# Altium PCB Drude02.PcbDoc (part 1 of 3)
Units mil, origin at the board's own origin, x right, y up, seen from the top; angles counter-clockwise.
Board outline 1961.13 x 2874.02 mil, 4 copper layers (Top Layer, GND, Supply, Bottom Layer), stack 59.85 mil thick; 217 components, 145 nets, 718 pads, 491 vias.
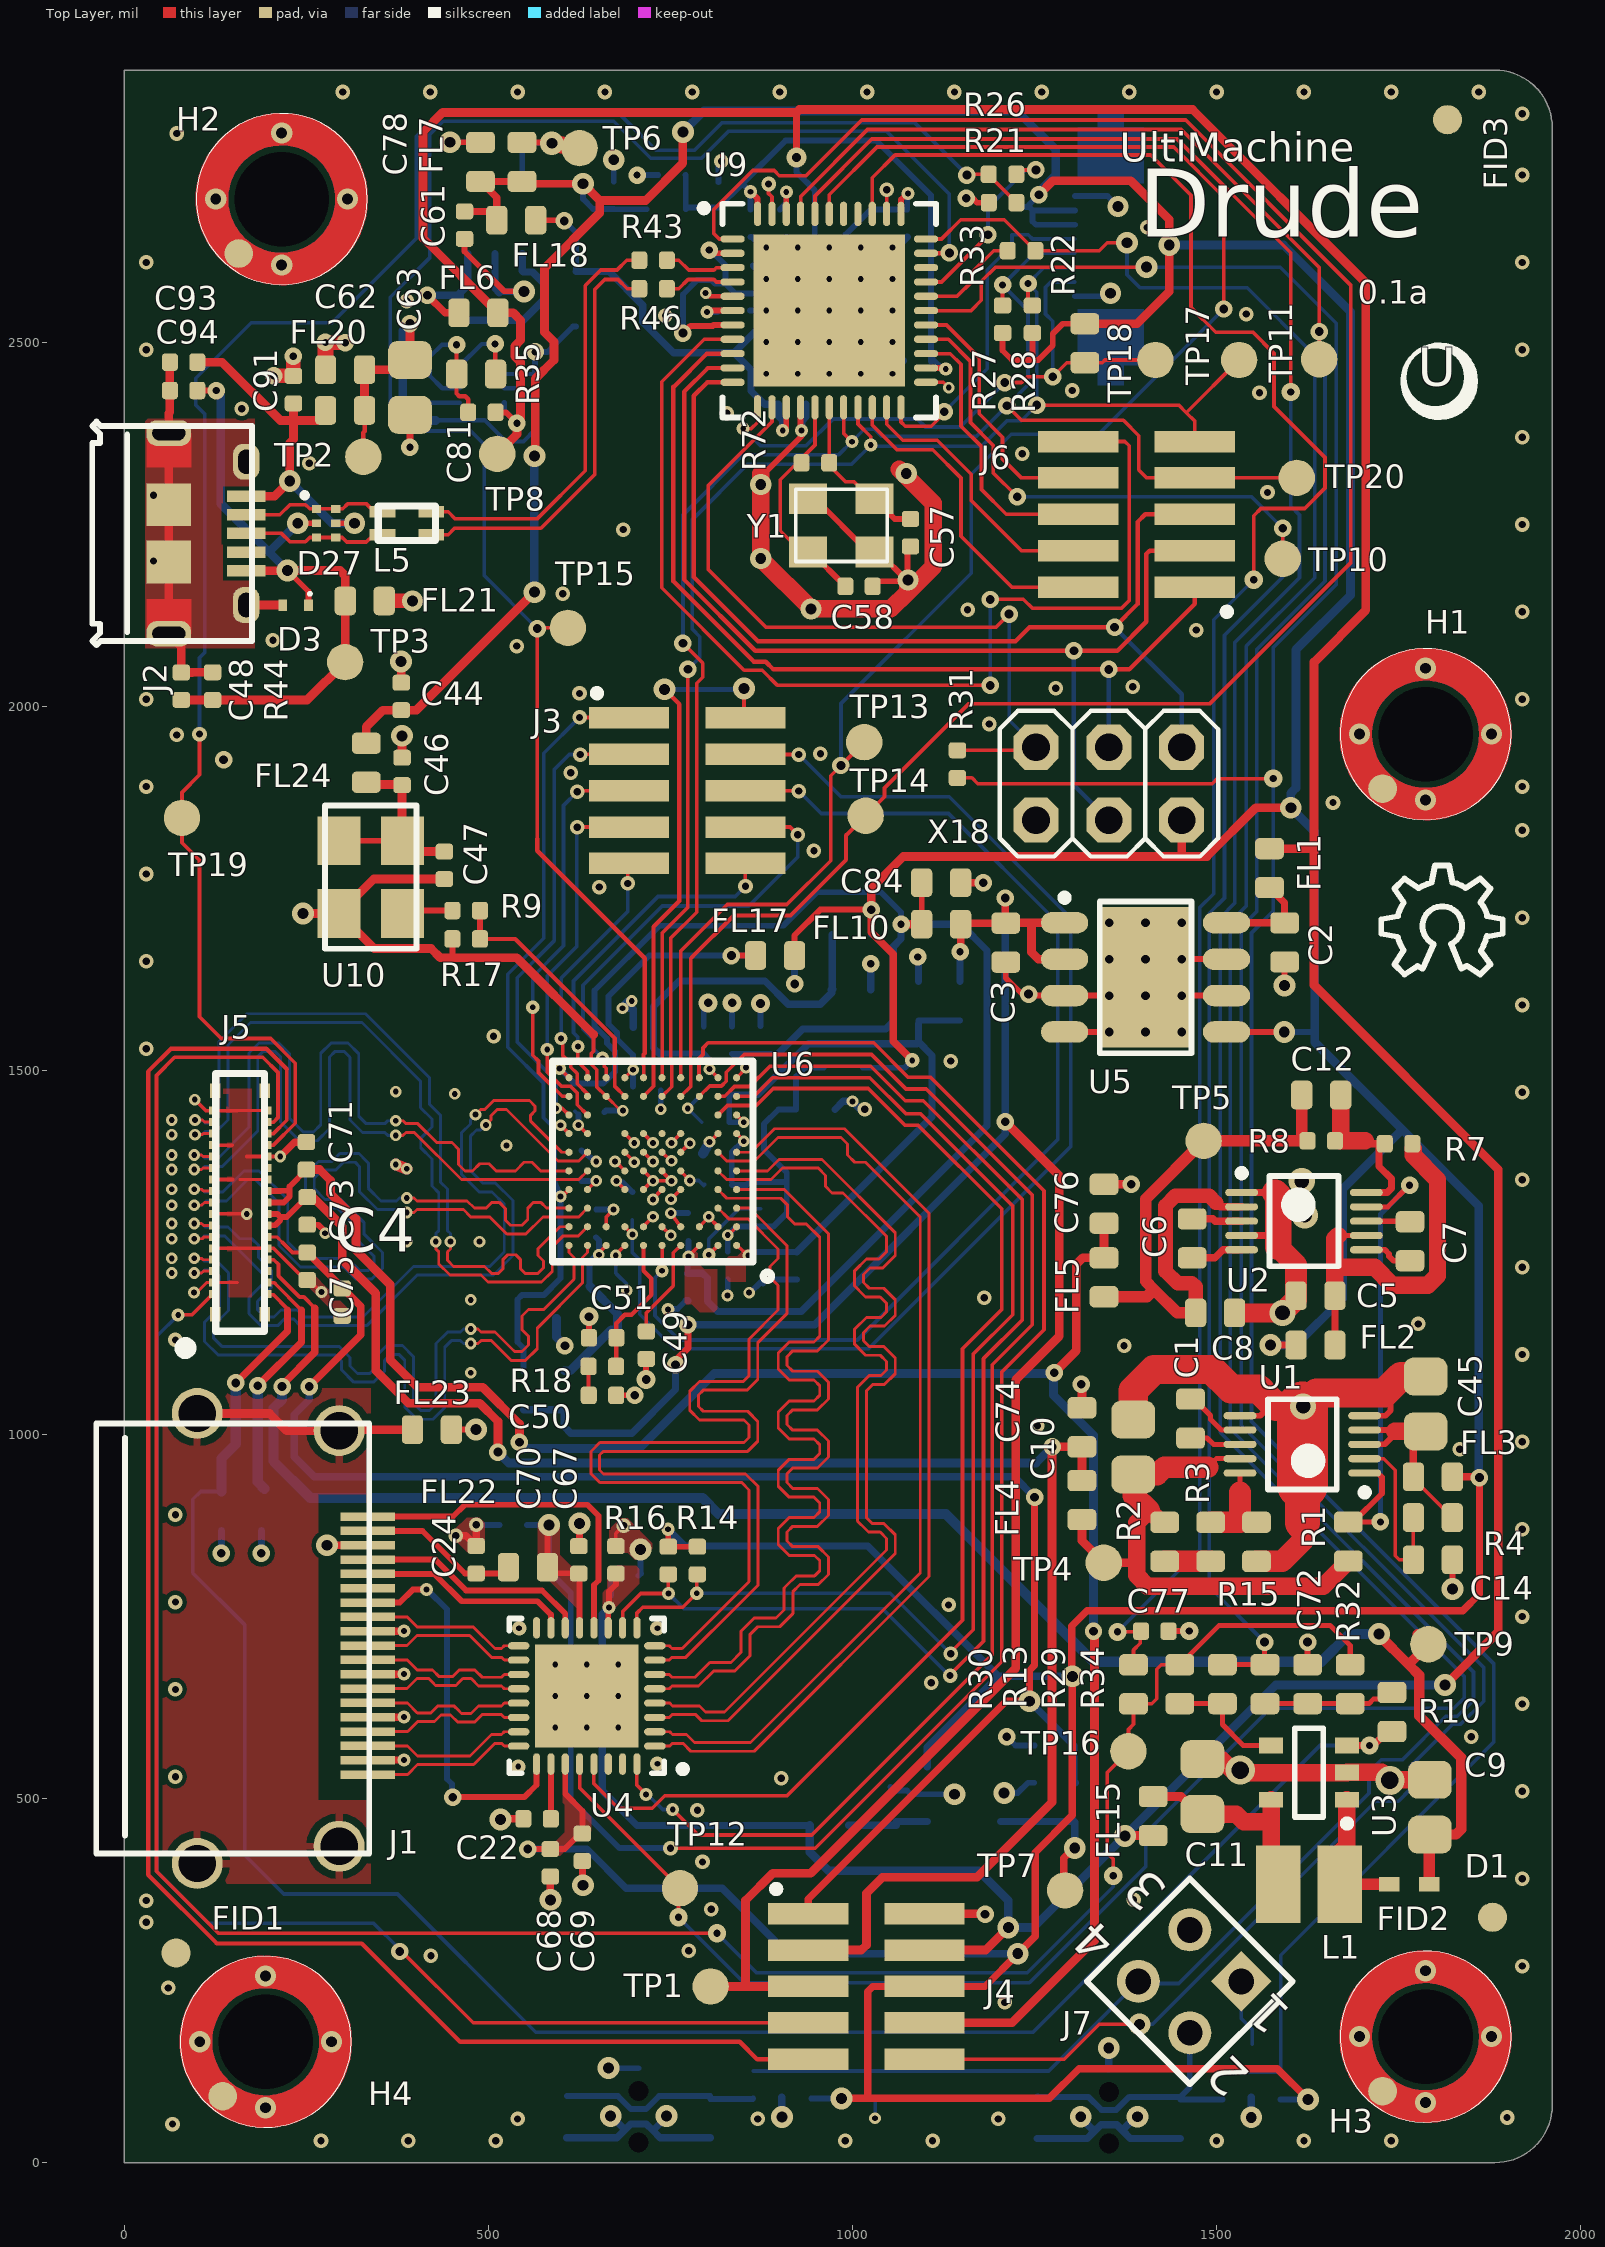
[diagram p0: Top Layer view]
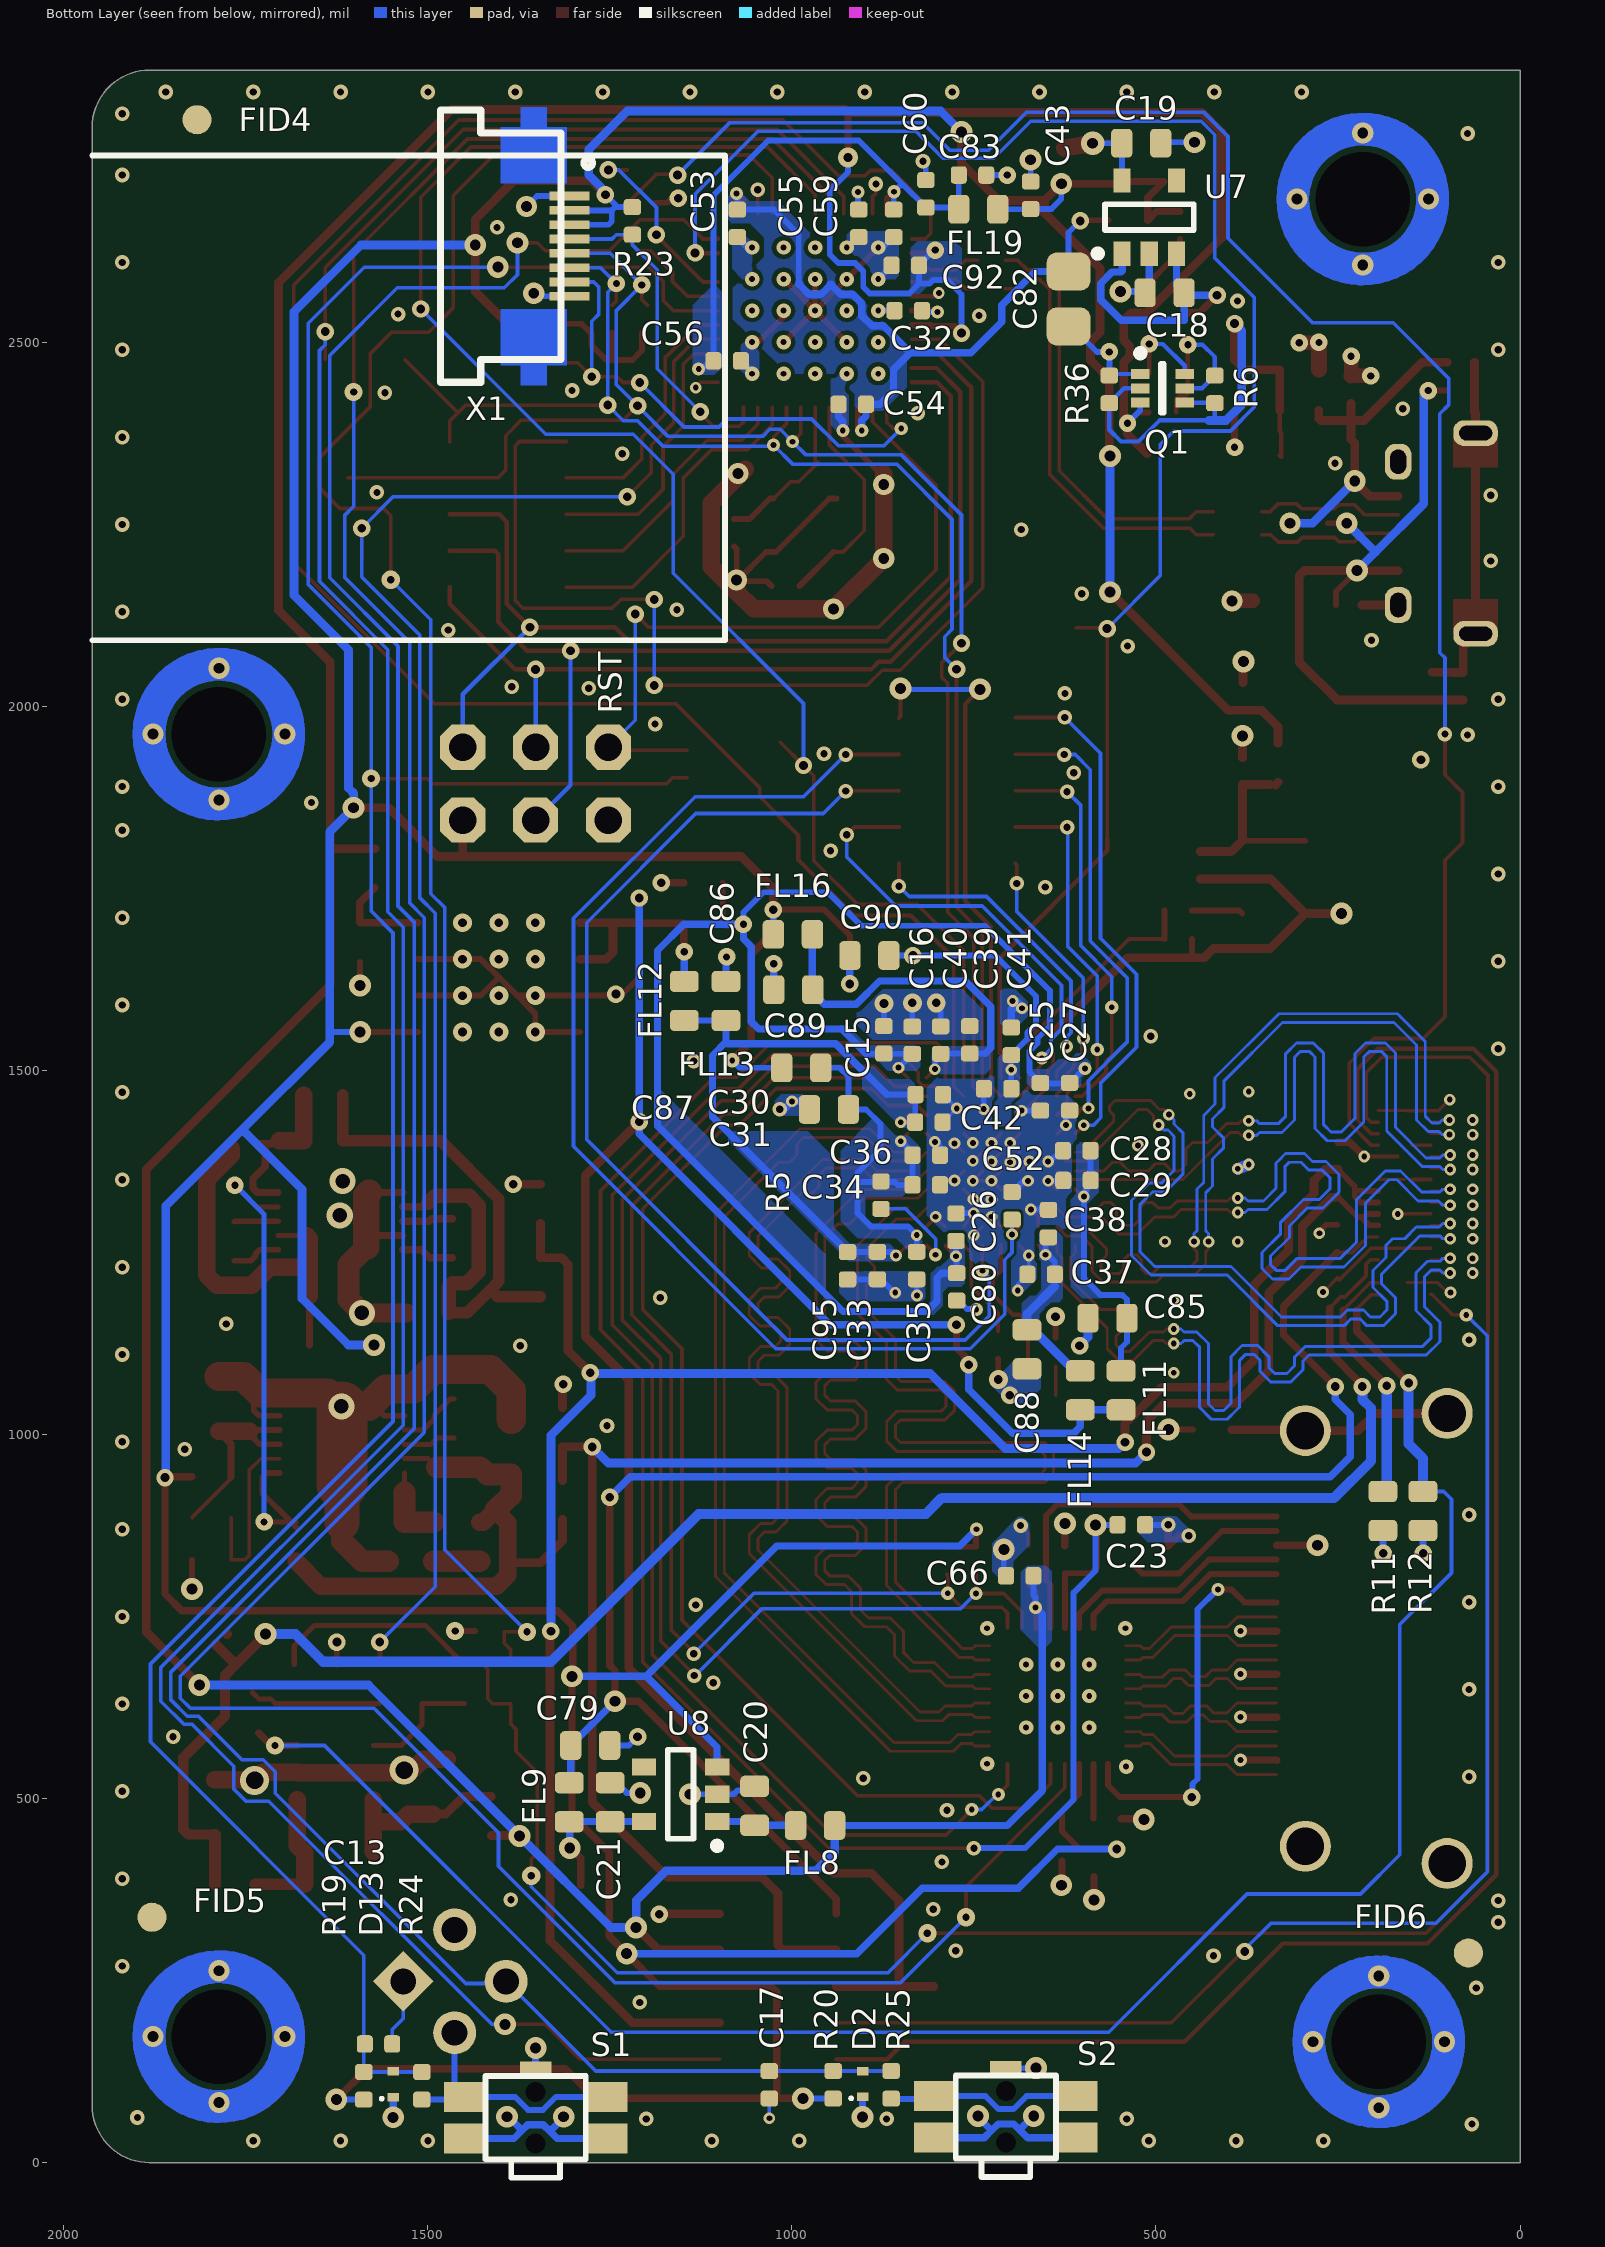
[diagram p1: Bottom Layer view, seen from below]
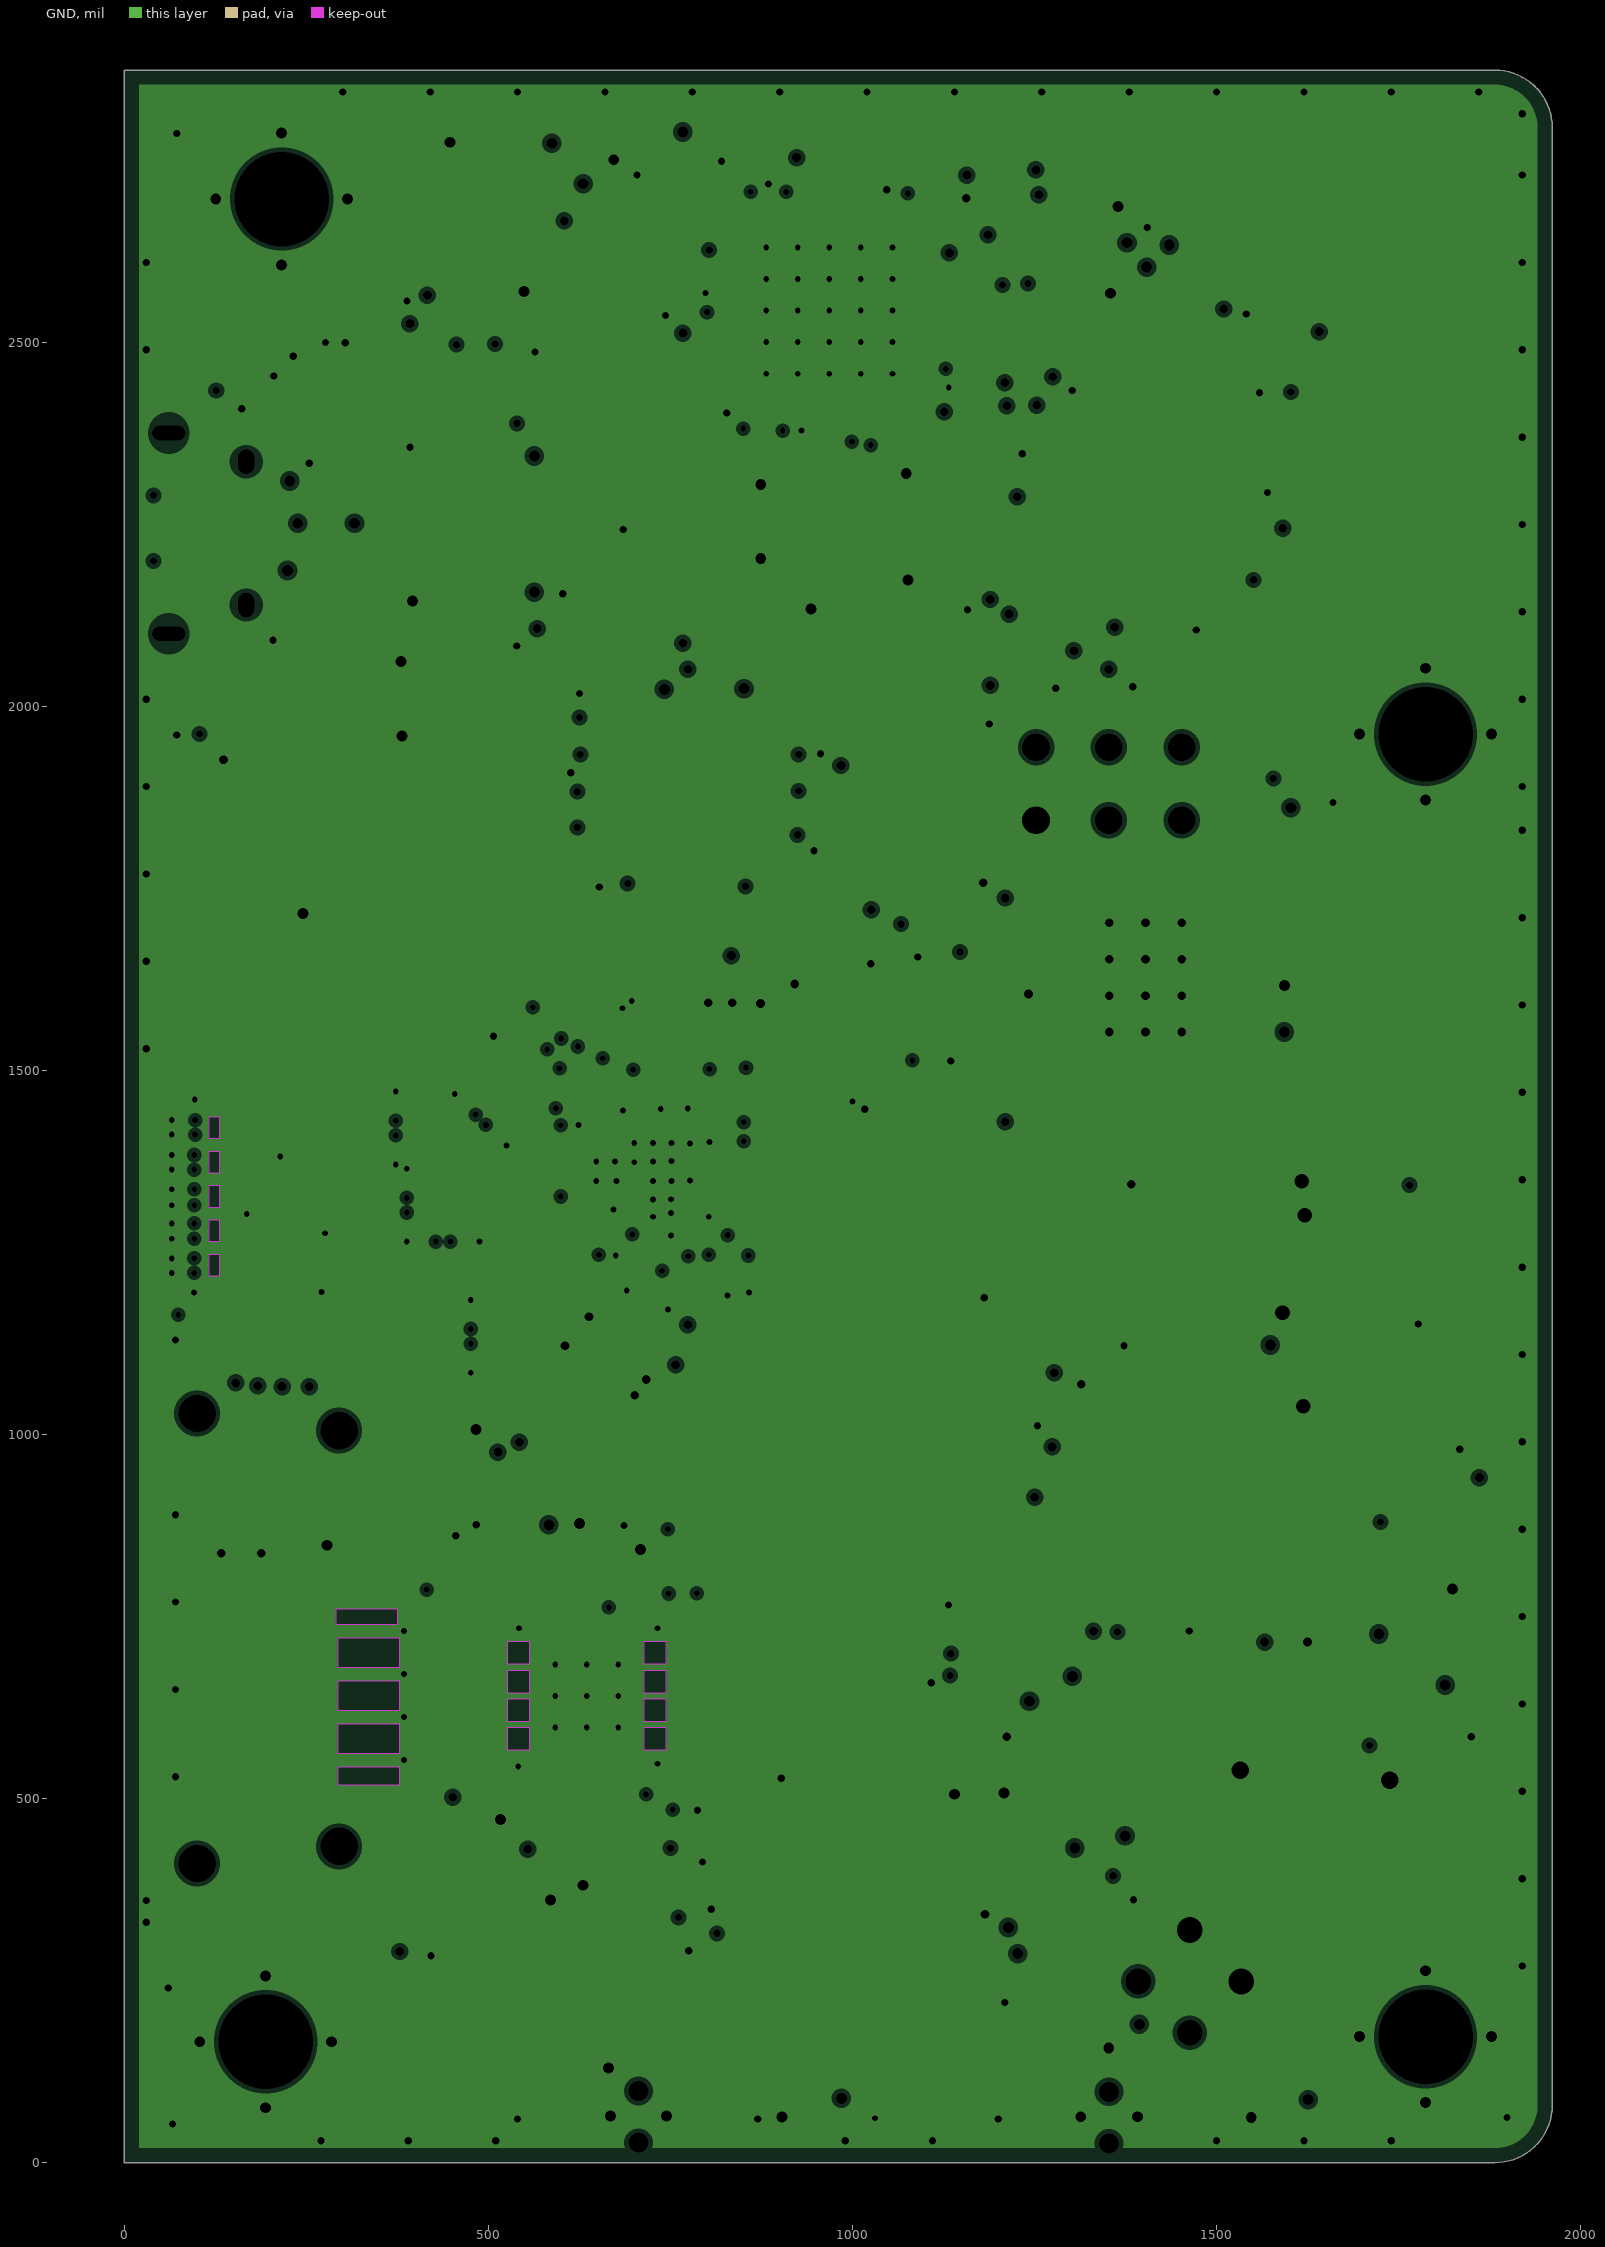
[diagram p2: GND, clearances drawn from the general rule]
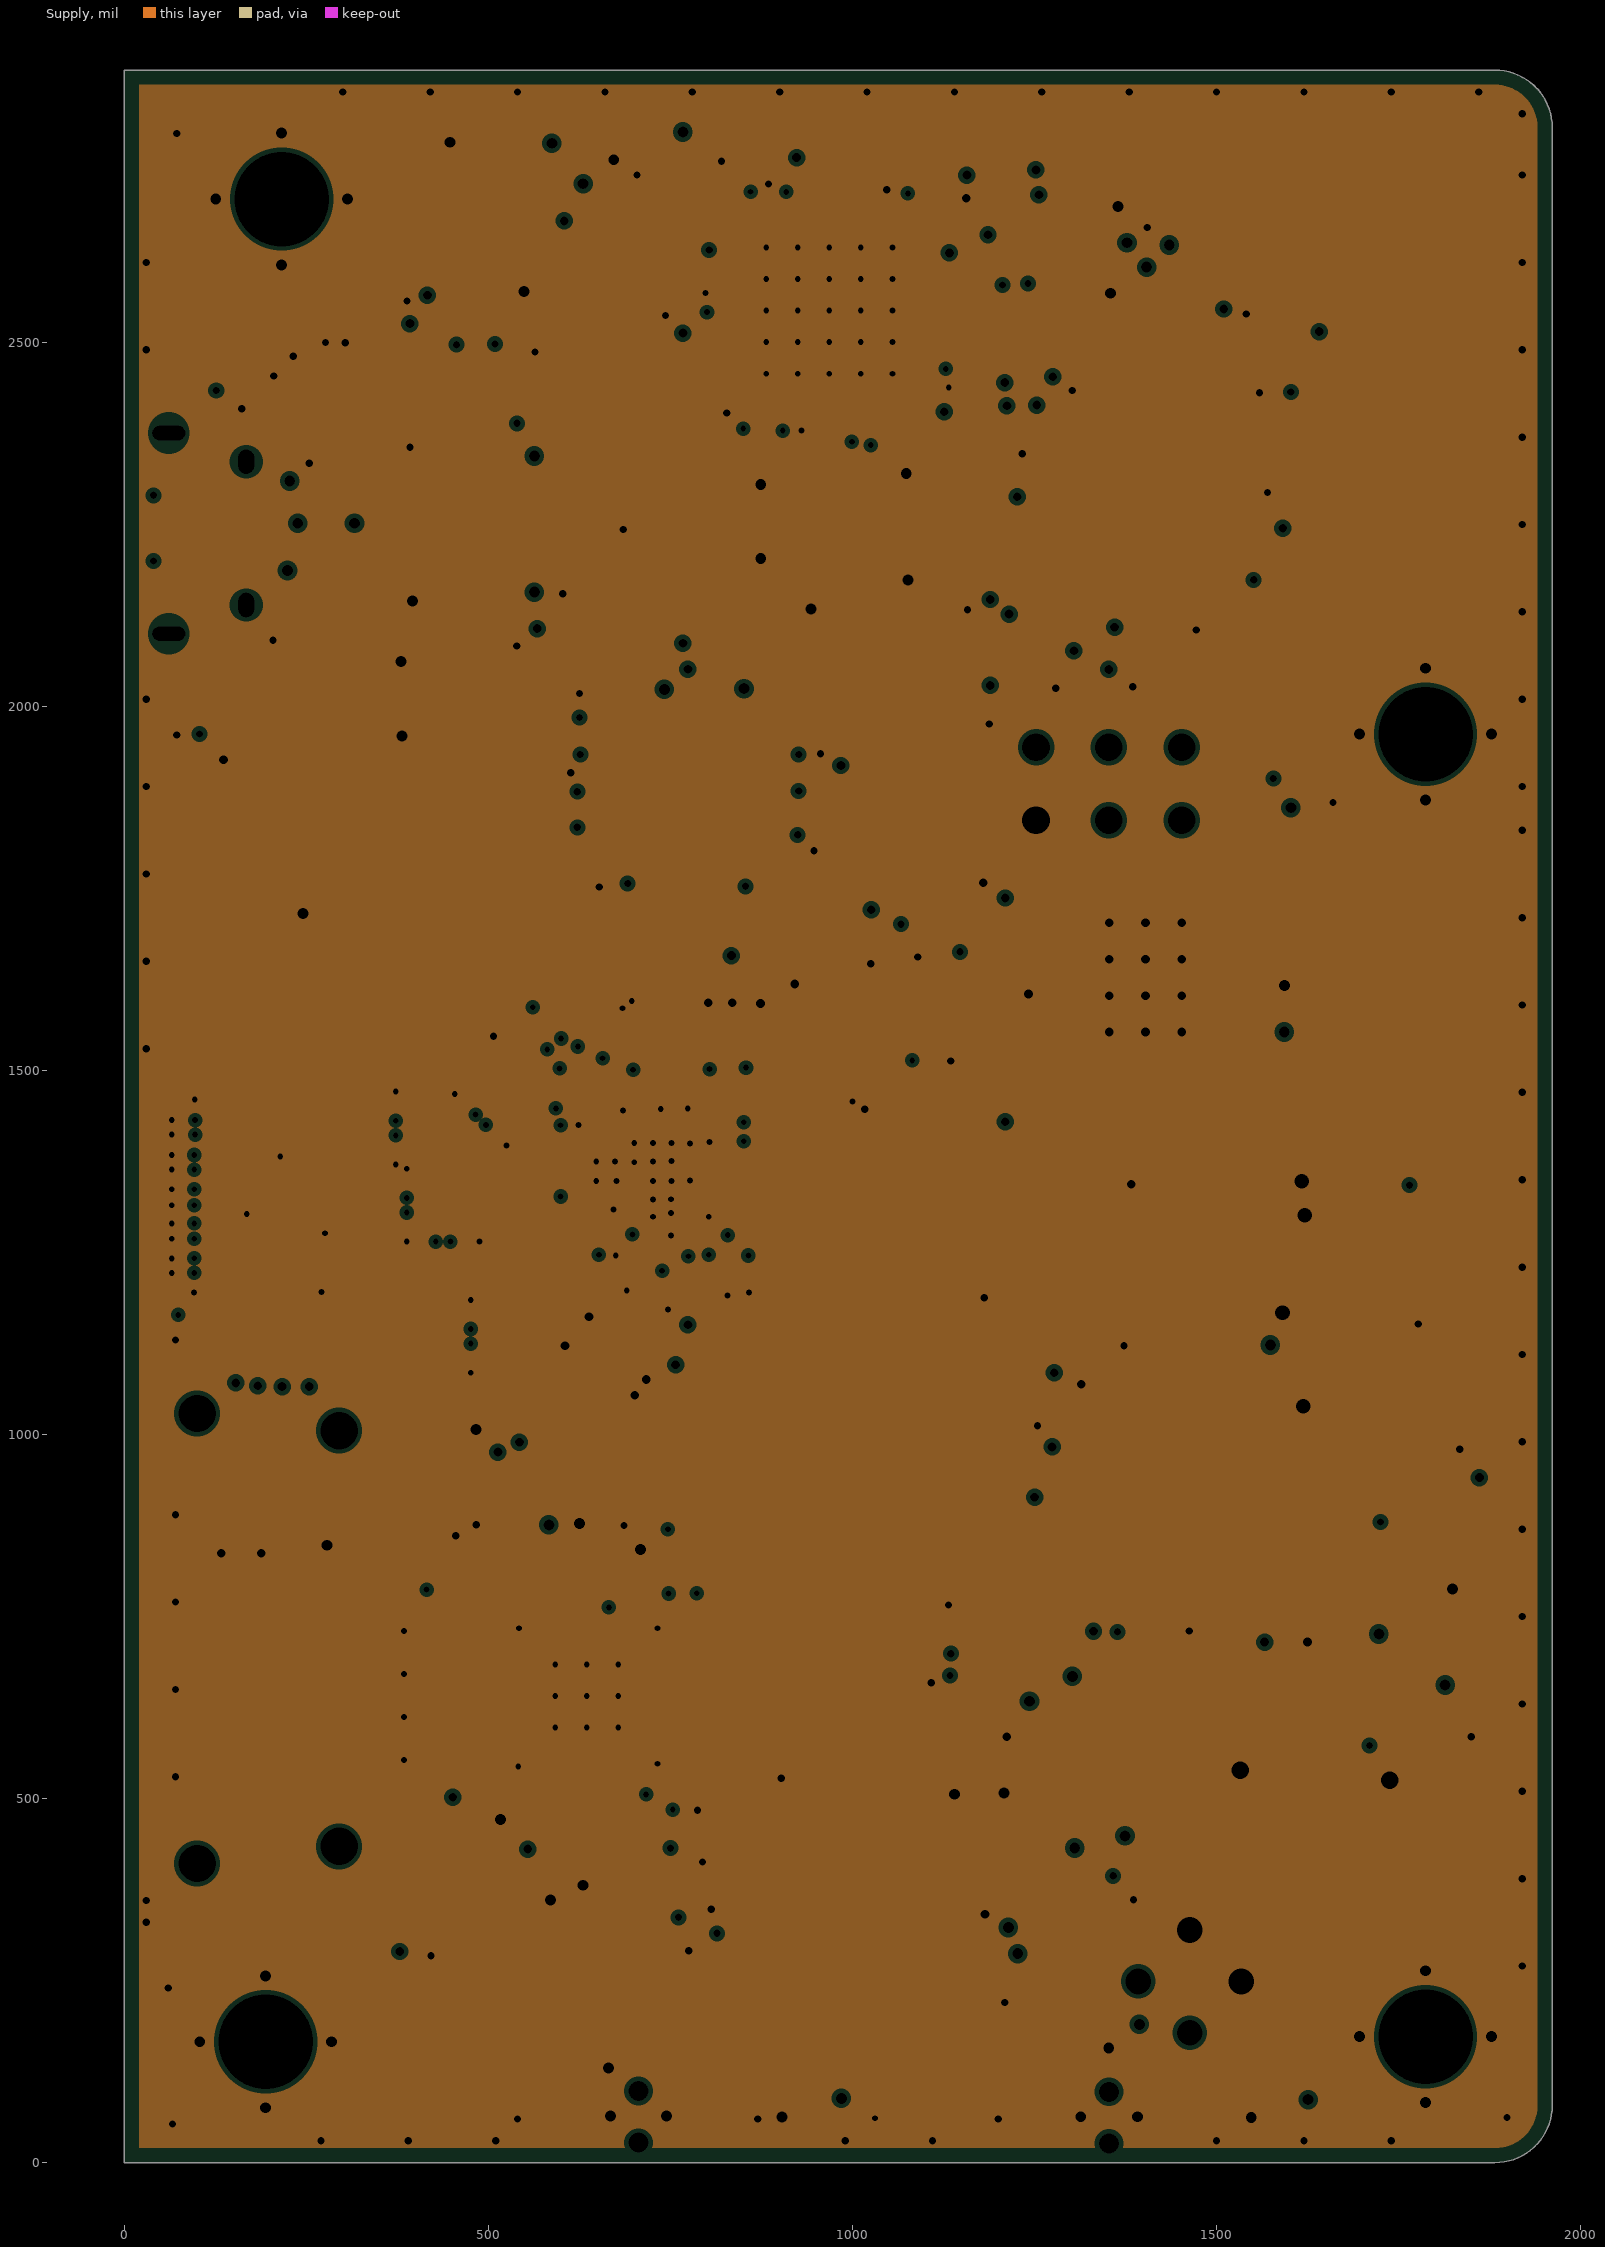
[diagram p3: Supply, clearances drawn from the general rule]

## Layer stack, top to bottom
Top Solder: solder mask 0.4, Solder Resist, Dk 3.5
Top Layer: signal copper 1.4
Dielectric 1: prepreg 3.5, FR-4 TG170, Dk 4.6
GND: plane copper 1.4, net GND
Dielectric 3: core 47.25, FR-4 TG170, Dk 4.6
Supply: plane copper 1.4, net GND
Dielectric 2: prepreg 3.5, FR-4 TG170, Dk 4.6
Bottom Layer: signal copper 1.4
Bottom Solder: solder mask 0.4, Solder Resist, Dk 3.5

## Board outline
0,0 1882.39,0 ccw(c1882.39,78.74) 1961.13,78.74 1961.13,2795.28 ccw(c1882.39,2795.28) 1882.39,2874.02 0,2874.02

## Design rules (kind name [scope] priority, off if disabled: settings)
AcuteAngle [All] p1: minimum=6.00000000000000E+0001 checktracksonly=FALSE
BoardOutlineClearance [All] p1: gap=10
Clearance Clearance_DisplayConn [WithinRoom('RoomDisplayConnector')] p1: gap=4
Clearance "Part Q1" [InComponent(Q1)] p2: gap=4
Clearance Clearance_Rooms [WithinRoom('RoomTC')    or WithinRoom('RoomIP') or WithinRoom('RoomHDMIConn')] p3: gap=4
Clearance Clearance_100rDiff [InNetClass('DSI')  or InNetClass('HDMI')   or InNetClass('HDMI_CONN')] p4: gap=8 except(4: Via-Via)
Clearance Clearance_90rDiff [InNetClass('USB')] p5: gap=8 except(4: Via-Via)
Clearance Clearance_100rDiffOtherNets [InNetClass('DSI')  or InNetClass('HDMI')   or InNetClass('HDMI_CONN')] p6: gap=24
Clearance [All] p7: gap=6
ComponentClearance ComponentClearance_Connectors [InComponentClass('Connectors')] p1: gap=1 collisioncheckmode=3 verticalgap=10 showdistances=FALSE
ComponentClearance [All] p2: gap=10 collisioncheckmode=3 verticalgap=10 showdistances=FALSE
DiffPairsRouting DiffPairsRouting_90r [InDifferentialPairClass('USB')] p1: maxlimit=8 minlimit=8 mostfreqgap=8 toplayer_minwidth=5 toplayer_maxwidth=5 toplayer_prefwidth=5 bottomlayer_minwidth=5 bottomlayer_maxwidth=5 bottomlayer_prefwidth=5 maxuncoupledlength=210
DiffPairsRouting DiffPairsRouting_DSI [InDifferentialPairClass('DSI')] p2: maxlimit=8 minlimit=8 mostfreqgap=8 toplayer_minwidth=4 toplayer_maxwidth=4 toplayer_prefwidth=4 bottomlayer_minwidth=4 bottomlayer_maxwidth=4 bottomlayer_prefwidth=4 maxuncoupledlength=360
DiffPairsRouting DiffPairsRouting_HDMI [InDifferentialPairClass('HDMI')] p3: maxlimit=8 minlimit=8 mostfreqgap=8 toplayer_minwidth=4 toplayer_maxwidth=4 toplayer_prefwidth=4 bottomlayer_minwidth=4 bottomlayer_maxwidth=4 bottomlayer_prefwidth=4 maxuncoupledlength=140
DiffPairsRouting DiffPairsRouting_short [All] p4: maxlimit=9 minlimit=8 mostfreqgap=8 toplayer_minwidth=4 toplayer_maxwidth=5 toplayer_prefwidth=4 bottomlayer_minwidth=4 bottomlayer_maxwidth=5 bottomlayer_prefwidth=4 maxuncoupledlength=210
HoleSize [All] p1: absolutevalues=TRUE maxlimit=100000 minlimit=8 maxpercent=80.000 minpercent=20.000
HoleToHoleClearance [All] p1: gap=8 allowstackedmicrovias=TRUE
MatchedLengths MatchLengths_L5_Passives_U9 [InxSignalClass('xSignals_L5_Passives_U9_MatchLengthsClass')] p1: tolerance=100 checknetsindiffpair=FALSE checkdiffpairvsdiffpair=TRUE checkxsignals=TRUE checkothers=TRUE
MatchedLengths MatchLengths_xSignals_L5_Passives [InxSignalClass('xSignals_L5_Passives_MatchLengthsClass')] p2: tolerance=100 checknetsindiffpair=FALSE checkdiffpairvsdiffpair=TRUE checkxsignals=TRUE checkothers=TRUE
MatchedLengths MatchLengths_xSignals_L5_U9 [InxSignalClass('xSignals_L5_U9_MatchLengthsClass')] p3: tolerance=100 checknetsindiffpair=FALSE checkdiffpairvsdiffpair=TRUE checkxsignals=TRUE checkothers=TRUE
MatchedLengths MatchLengths_J2_Passives_U9 [InxSignalClass('xSignals_J2_Passives_U9_MatchLengthsClass')] p4: tolerance=100 checknetsindiffpair=FALSE checkdiffpairvsdiffpair=TRUE checkxsignals=TRUE checkothers=TRUE
MatchedLengths MatchLengths_xSignals_J2_Passives [InxSignalClass('xSignals_J2_Passives_MatchLengthsClass')] p5: tolerance=100 checknetsindiffpair=FALSE checkdiffpairvsdiffpair=TRUE checkxsignals=TRUE checkothers=TRUE
MatchedLengths MatchLengths_xSignals_J2_U9 [InxSignalClass('xSignals_J2_U9_MatchLengthsClass')] p6: tolerance=100 checknetsindiffpair=FALSE checkdiffpairvsdiffpair=TRUE checkxsignals=TRUE checkothers=TRUE
MatchedLengths MatchedLengths-DSI_Group [InNetClass('DSI')] p7: tolerance=1 checknetsindiffpair=FALSE checkdiffpairvsdiffpair=TRUE checkxsignals=TRUE checkothers=TRUE
MatchedLengths MatchedLengths-DSI [InNetClass('DSI')] p8: tolerance=1 checknetsindiffpair=TRUE checkdiffpairvsdiffpair=FALSE checkxsignals=FALSE checkothers=FALSE
MatchedLengths MatchedLengths-HDMI [InNetClass('HDMI')] p9: tolerance=1 checknetsindiffpair=TRUE checkdiffpairvsdiffpair=FALSE checkxsignals=FALSE checkothers=FALSE
MatchedLengths MatchedLengths-HDMI_CONN [InNetClass('HDMI_CONN')] p10: tolerance=1 checknetsindiffpair=TRUE checkdiffpairvsdiffpair=FALSE checkxsignals=FALSE checkothers=FALSE
MinimumAnnularRing [All] p1: minimumring=4
MinimumSolderMaskSliver [All] p1: minsoldermaskwidth=4
ParallelSegment ParallelSegment_USB_8 [(InDifferentialPairClass('USB')) vs (InDifferentialPairClass('USB'))] p1: limit=3000 gap=8
ParallelSegment ParallelSegment_USB_15 [(InDifferentialPairClass('USB')) vs (InDifferentialPairClass('USB'))] p2: limit=300 gap=8
ParallelSegment ParallelSegment_Lane2 [InDifferentialPair('LANE2') vs InDifferentialPair('LANE2')] p3: limit=3000 gap=8
ParallelSegment ParallelSegment_Lane3 [InDifferentialPair('LANE3') vs InDifferentialPair('LANE3')] p4: limit=3000 gap=8
ParallelSegment ParallelSegment_Lane1 [InDifferentialPair('LANE1') vs InDifferentialPair('LANE1')] p5: limit=3000 gap=8
ParallelSegment ParallelSegment_Lane0 [InDifferentialPair('LANE0') vs InDifferentialPair('LANE0')] p6: limit=3000 gap=8
ParallelSegment ParallelSegment_DSI_CLK [InDifferentialPair('DSI_CLK') vs InDifferentialPair('DSI_CLK')] p7: limit=3000 gap=8
ParallelSegment ParallelSegment_HDMI_D1 [InDifferentialPair('HDMI_D1') vs InDifferentialPair('HDMI_D1')] p8: limit=3000 gap=8
ParallelSegment ParallelSegment_HDMI_D0 [InDifferentialPair('HDMI_D0') vs InDifferentialPair('hdmi_d0')] p9: limit=3000 gap=8
ParallelSegment ParallelSegment_HDMI_D2 [InDifferentialPair('hdmi_d2') vs InDifferentialPair('hdmi_d2')] p10: limit=3000 gap=8
ParallelSegment ParallelSegment_HDMI_CK [InDifferentialPair('HDMI_CK') vs InDifferentialPair('HDMI_CK')] p11: limit=3000 gap=8
ParallelSegment ParallelSegment_HDMI_CON_CK [InDifferentialPair('HDMI_CON_CK') vs InDifferentialPair('HDMI_CON_CK')] p12: limit=3000 gap=8
ParallelSegment ParallelSegment_HDMI_CON_D1 [InDifferentialPair('HDMI_CON_D1') vs InDifferentialPair('HDMI_CON_D1')] p13: limit=3000 gap=8
ParallelSegment ParallelSegment_HDMI_CON_D0 [InDifferentialPair('HDMI_CON_D0') vs InDifferentialPair('HDMI_CON_D0')] p14: limit=3000 gap=8
ParallelSegment ParallelSegment_HDMI_CON_D0_1 [InDifferentialPair('HDMI_CON_D2') vs InDifferentialPair('HDMI_CON_D2')] p15: limit=3000 gap=8
ParallelSegment ParallelSegment_long [(InDifferentialPairClass('All Differential Pairs'))] p16: limit=106 gap=24
PasteMaskExpansion [All] p1: expansion=-1
PlaneClearance PlaneClearanceDifferential [InNetClass('DSI')] p1: clearance=7
PlaneClearance [All] p2: clearance=6
PlaneConnect PowerPlaneConnect [InNet('+12V')] p1: planeconnectstyle=Relief reliefexpansion=20 reliefentries=4 reliefconductorwidth=24 reliefairgap=10
PlaneConnect PlaneConnect_Via [IsVia] p2: planeconnectstyle=Direct reliefexpansion=20 reliefentries=4 reliefconductorwidth=10 reliefairgap=10
PlaneConnect [All] p3: planeconnectstyle=Relief reliefexpansion=20 reliefentries=4 reliefconductorwidth=10 reliefairgap=10
PolygonConnect ThermalVias [IsVia] p1: connectstyle=Direct reliefconductorwidth=10 reliefentries=4 polygonreliefangle="90 Angle" airgapwidth=10
PolygonConnect PolygonConnect_no_connect [IsNamedPolygon('No-Connect')] p2: connectstyle=NoConnect reliefconductorwidth=24 reliefentries=4 polygonreliefangle="90 Angle" airgapwidth=10
PolygonConnect "Direct Connect" [IsNamedPolygon('Direct-Connect')] p3: connectstyle=Direct reliefconductorwidth=10 reliefentries=4 polygonreliefangle="90 Angle" airgapwidth=10
PolygonConnect [All] p4: connectstyle=Relief reliefconductorwidth=10 reliefentries=4 polygonreliefangle="90 Angle" airgapwidth=10
RoomDefinition RoomTC [InComponentClass('Components Class 1')] p1: selectionmemoryflags=16 confinementstyle=ConfineIn formatcopy=TRUE lockcomponents=FALSE outline 517.67,1522 867.4,1522 867.4,1408.07 908.97,1408.07 908.97,1216 517.67,1216
RoomDefinition RoomHDMIConn [InComponentClass('Components Class 1')] p2: confinementstyle=ConfineOut formatcopy=TRUE lockcomponents=FALSE outline 409,526.46 298.22,526.46 298.22,895.56 409,895.56
RoomDefinition RoomIP [InComponentClass('Components Class 1')] p3: confinementstyle=ConfineOut formatcopy=TRUE lockcomponents=FALSE outline 801,521 473,521 473,762 801,762
RoomDefinition RoomDisplayConnector [Not IsComponent] p4: confinementstyle=ConfineIn formatcopy=TRUE lockcomponents=FALSE outline 76.1,1179.13 76.1,1520.67 227.87,1520.67 227.87,1179.13
RoutingCorners [All] p1: cornerstyle=45-Degree minsetback=30 maxsetback=30
RoutingVias RoutingVias_DSI [InNetClass('DSI')] p1: holewidth=8 width=16 viastyle="Through Hole" minholewidth=8 minwidth=16 maxholewidth=8 maxwidth=16
RoutingVias [All] p2: holewidth=15 width=30 viastyle="Through Hole" minholewidth=8 minwidth=16 maxholewidth=28 maxwidth=50
SMDEntry [0=1] p1: side=TRUE corner=TRUE anyangle=FALSE
SMDToCorner [All] p1: distance=30000
SilkToSilkClearance [All] p1 off: silktosilkclearance=10
SilkToSolderMaskClearance [IsPad] p1 off: minsilkscreentomaskgap=10 clearancetoexposedcopper=TRUE
SolderMaskExpansion ViaTent [(IsVia)  And (HoleDiameter < 0.635   )] p1: expansion=-50
SolderMaskExpansion SolderMaskExpansion_Via [IsVia] p2: expansion=-16
SolderMaskExpansion [All] p3: expansion=3
Width Width_RoomTC [WithinRoom('RoomTC')] p1: maxlimit=20 minlimit=4 preferedwidth=8 toplayer_maxwidth=5 toplayer_prefwidth=5 minimp=50.000000 maximp=50.000000 favimp=50.000000
Width Width_100rDiff [InNetClass('DSI')  or InNetClass('HDMI')   or InNetClass('HDMI_CONN')] p2: maxlimit=5.7 minlimit=4 preferedwidth=5.7 minimp=50.000000 maximp=50.000000 favimp=50.000000
Width Width_90rDiff [InNetClass('USB')] p3: maxlimit=5 minlimit=5 preferedwidth=5 minimp=50.000000 maximp=50.000000 favimp=50.000000
Width Width_DisplayConn [WithinRoom('RoomDisplayConnector')] p4: maxlimit=8 minlimit=4 preferedwidth=5 minimp=50.000000 maximp=50.000000 favimp=50.000000
Width [All] p5: maxlimit=100 minlimit=5 preferedwidth=8 minimp=50.000000 maximp=50.000000 favimp=50.000000
19 further rules are at their usual default settings.

## Classes and differential pairs
net class HDMI_CONN: HDMI_CON_CK_N HDMI_CON_CK_P HDMI_CON_D0_N HDMI_CON_D0_P HDMI_CON_D1_N HDMI_CON_D1_P HDMI_CON_D2_N HDMI_CON_D2_P
differential pair class HDMI_CONN: HDMI_CON_CK HDMI_CON_D0 HDMI_CON_D1 HDMI_CON_D2
differential pair class DSI: DSI_CLK LANE0 LANE1 LANE2 LANE3
differential pair class HDMI: HDMI_CK HDMI_D0 HDMI_D1 HDMI_D2
differential pair class USB: UD
component class DrudePower: C1 C2 C3 C5 C6 C7 C8 C9 C10 C11 C12 C14 C18 C19 C20 C21 C45 C72 C74 C76 C78 C79 C81 D1 FID1 FID2 FID3 FID4 FID5 FID6 FL1 FL2 FL3 FL4 FL5 FL6 FL7 FL8 FL9 FL15 H1 H2 H3 H4 L1 Q1 R1 R2 R3 R4 R6 R7 R8 R10 R11 R12 R13 R15 R29 R32 R34 R35 R36 TP1 TP4 TP5 TP6 TP7 TP8 TP9 TP10 U1 U2 U3 U5 U7 U8
component class LCD-Touch: C4 C71 C73 C75 J4 J5 R22 R23 X1
component class MCU: C13 C17 C32 C43 C48 C53 C54 C55 C56 C57 C58 C59 C60 C61 C62 C63 C77 C82 C83 C91 C92 C93 C94 D2 D3 D13 D27 FL18 FL19 FL20 FL21 J2 J6 J7 L5 L7 R19 R20 R21 R24 R25 R26 R27 R28 R30 R31 R33 R43 R44 R46 R72 S1 S2 TP2 TP3 TP11 TP12 TP13 TP14 TP15 TP16 TP17 TP18 TP19 TP20 U9 X18 Y1
component class HDMI: C22 C23 C24 C66 C67 C68 C69 C70 FL22 FL23 J1 R14 R16 U4
net class HDMI: HDMI_CK_N HDMI_CK_P HDMI_D0_N HDMI_D0_P HDMI_D1_N HDMI_D1_P HDMI_D2_N HDMI_D2_P
component class TC358779XBG: C15 C16 C25 C26 C27 C28 C29 C30 C31 C33 C34 C35 C36 C37 C38 C39 C40 C41 C42 C44 C46 C47 C49 C50 C51 C52 C80 C84 C85 C86 C87 C88 C89 C90 C95 FL10 FL11 FL12 FL13 FL14 FL16 FL17 FL24 J3 R5 R9 R17 R18 U6 U10
net class DSI: DSI_CLK_N DSI_CLK_P LANE0_N LANE0_P LANE1_N LANE1_P LANE2_N LANE2_P LANE3_N LANE3_P
net class USB: UC_N UC_P UD_N UD_P UR_N UR_P
differential pair DSI_CLK: +DSI_CLK_P -DSI_CLK_N
differential pair LANE0: +LANE0_P -LANE0_N
differential pair LANE1: +LANE1_P -LANE1_N
differential pair LANE2: +LANE2_P -LANE2_N
differential pair LANE3: +LANE3_P -LANE3_N
differential pair HDMI_CK: +HDMI_CK_P -HDMI_CK_N
differential pair HDMI_D0: +HDMI_D0_P -HDMI_D0_N
differential pair HDMI_D1: +HDMI_D1_P -HDMI_D1_N
differential pair HDMI_D2: +HDMI_D2_P -HDMI_D2_N
differential pair HDMI_CON_CK: +HDMI_CON_CK_P -HDMI_CON_CK_N
differential pair HDMI_CON_D0: +HDMI_CON_D0_P -HDMI_CON_D0_N
differential pair HDMI_CON_D1: +HDMI_CON_D1_P -HDMI_CON_D1_N
differential pair HDMI_CON_D2: +HDMI_CON_D2_P -HDMI_CON_D2_N
differential pair UC: +UC_P -UC_N
differential pair UD: +UD_P -UD_N
differential pair UR: +UR_P -UR_N

## Components (designator, comment, footprint, x,y, rotation, side; value= is the part's Value field where it differs from the comment)
C1 "330nF" C0603 1464.31,1022.03 r270 top
C2 "4.7uF" C0603 1593.46,1676 r270 top
C3 "4.7uF" C0603 1210.51,1675.65 r270 top
C4 "C0402TBD" C0402 299,1182 r270 top
C5 "1uF" C0603 1635.87,1190.76 r180 top
C6 "100nF" C0603 1466.58,1269.5 r270 top
C7 "100nF" C0603 1765.8,1265.57 r270 top
C8 "4.7uF" C0603 1498.08,1167.14 r0 top
C9 "1uF" C0805 1793,488 r90 top
C10 "10uF" C0805 1385.57,982.66 r90 top
C11 "10uF" C0805 1480.62,516.17 r90 top
C12 "" C0603 1643.75,1466.35 r180 top
C13 "C0402TBD" C0402 1568,163 r180 bottom
C14 "100nF" C0603 1797.11,828 r0 top
C15 "100nF" C0402 873.67,1542 r90 bottom
C16 "10nF" C0402 834.67,1542 r270 bottom
C17 "C0402TBD" C0402 1031,107 r270 bottom
C18 "4.7uF" C0603 488.11,2568.32 r0 bottom
C19 "4.7uF" C0603 520.24,2773.69 r180 bottom
C20 "4.7uF" C0603 1051.32,490.11 r90 bottom
C21 "4.7uF" C0603 1249.71,495.08 r90 bottom
C22 "100nF" C0402 566.92,472.33 r180 top
C23 "1uF" C0402 534,876 r180 bottom
C24 "10nF" C0402 483.13,828.24 r270 top
C25 "100nF" C0402 658.67,1464 r270 bottom
C26 "10nF" C0402 774.67,1285 r270 bottom
C27 "10nF" C0402 618.67,1464 r90 bottom
C28 "100nF" C0402 608.67,1390 r0 bottom
C29 "10nF" C0402 608.67,1349 r180 bottom
C30 "100nF" C0402 811.68,1467 r180 bottom
C31 "10nF" C0402 811.67,1429 r0 bottom
C32 "1uF" C0402 840.11,2543.76 r0 bottom
C33 "10nF" C0402 882.67,1232 r90 bottom
C34 "100nF" C0402 815.67,1343 r180 bottom
C35 "10nF" C0402 828.67,1232 r90 bottom
C36 "10nF" C0402 815.24,1383.8 r0 bottom
C37 "100nF" C0402 657.67,1220 r0 bottom
C38 "10nF" C0402 647.67,1290 r270 bottom
C39 "100nF" C0402 755.67,1542 r90 bottom
C40 "10nF" C0402 795.67,1542 r270 bottom
C41 "100nF" C0402 698.67,1540 r90 bottom
C42 "10nF" C0402 717.67,1475 r180 bottom
C43 "C0402TBD" C0402 672.11,2702 r90 bottom
C44 "10nF" C0402 380.32,2014 r270 top
C45 "10uF" C0805 1787.15,1041.72 r90 top
C46 "1uF" C0402 381.3,1910.74 r90 top
C47 "10nF" C0402 439.3,1781.74 r90 top
C48 "4.7nF" C0402 78.11,2028 r270 top
C49 "100nF" C0402 716.93,1123 r270 top
C50 "C0402TBD" C0402 656.43,1054 r0 top
C51 "100nF" C0402 657,1133 r180 top
C52 "100nF" C0402 697.67,1314 r90 bottom
C53 "100nF" C0402 1075.11,2663.76 r270 bottom
C54 "100nF" C0402 917.11,2415 r0 bottom
C55 "100nF" C0402 908.11,2663.76 r270 bottom
C56 "100nF" C0402 1089.11,2474.76 r180 bottom
C57 "22pF" C0402 1079.65,2238.98 r270 top
C58 "22pF" C0402 1008.78,2165.16 r0 top
C59 "100nF" C0402 860.11,2663.76 r270 bottom
C60 "100nF" C0402 816,2704.02 r90 bottom
C61 "C0402TBD" C0402 467.11,2661 r90 top
C62 "1uF" C0603 303.11,2462.65 r180 top
C63 "C0805TBD" C0805 392.11,2438.65 r270 top
C66 "100nF" C0402 687,806 r0 bottom
C67 "10nF" C0402 675,828 r270 top
C68 "100nF" C0402 585,412 r270 top
C69 "10nF" C0402 629,433 r90 top
C70 "10nF" C0402 624,828 r270 top
C71 "10nF" C0402 250,1383 r270 top
C72 "C0603TBD" C0603 1625.12,657.17 r90 top
C73 "10nF" C0402 251,1307 r90 top
C74 "4.7uF" C0603 1315.11,1010 r90 top
C75 "10nF" C0402 251,1231 r90 top
C76 "4.7uF" C0603 1345.47,1317 r90 top
C77 "C0402TBD" C0402 1415,730 r0 top
C78 "4.7uF" C0603 489.11,2748 r90 top
C79 "4.7uF" C0603 1277,573 r180 bottom
C80 "100nF" C0402 773.78,1203 r270 bottom
C81 "100nF" C0402 491.11,2404 r180 top
C82 "10uF" C0805 620.11,2560 r270 bottom
C83 "1uF" C0402 752.11,2730 r180 bottom
C84 "4.7uF" C0603 1121.78,1758 r0 top
C85 "4.7uF" C0603 566.69,1159.82 r0 bottom
C86 "4.7uF" C0603 1090.58,1595.63 r90 bottom
C87 "4.7uF" C0603 949.21,1446.58 r0 bottom
C88 "4.7uF" C0603 677.17,1117.13 r270 bottom
C89 "4.7uF" C0603 998.21,1611 r0 bottom
C90 "4.7uF" C0603 893.67,1658 r0 bottom
C91 "10nF" C0402 232.11,2435 r90 top
C92 "100nF" C0402 844.11,2606 r0 bottom
C93 "C0402TBD" C0402 81.11,2473 r0 top
C94 "C0402TBD" C0402 81.11,2434 r0 top
C95 "100nF" C0402 923.67,1232.01 r270 bottom
D1 "BAT54" SOD523 1764.8,382.14 r180 top
D2 "ESD9B3.3ST5G" SOD923-100X40-2N 903,108 r90 bottom
D3 "ESD9B3.3ST5G" SOD923-100X40-2N 235.11,2139 r180 top
D13 "ESD9B3.3ST5G" SOD923-100X40-2N 1547.68,107.57 r90 bottom
D27 "PRTR5V0U2F" SOT886 277,2251.76 r270 top
FID1 "FIDUCIAL" FIDUCIAL-1X2 71,288 r90 top
FID2 "FIDUCIAL" FIDUCIAL-1X2 1879.11,337 r90 top
FID3 "FIDUCIAL" FIDUCIAL-1X2 1817.11,2806 r90 top
FID4 "FIDUCIAL" FIDUCIAL-1X2 1817.11,2806 r90 bottom
FID5 "FIDUCIAL" FIDUCIAL-1X2 1879.11,337 r90 bottom
FID6 "FIDUCIAL" FIDUCIAL-1X2 71,288 r90 bottom
FL1 "MPZ1608S221A" C0603 1572.8,1778 r270 top
FL2 "MPZ1608S221A" C0603 1635.87,1123 r0 top
FL3 "MPZ1608S221A" C0603 1797.11,942 r0 top
FL4 "MPZ1608S221A" C0603 1315.11,910 r90 top
FL5 "MPZ1608S221A" C0603 1345.47,1216 r90 top
FL6 "MPZ1608S221A" C0603 486.11,2540.76 r180 top
FL7 "MPZ1608S221A" C0603 546.11,2748 r270 top
FL8 "MPZ1608S221A" C0603 968.11,463 r0 bottom
FL9 "MPZ1608S221A" C0603 1306,495 r90 bottom
FL10 "MPZ1608S221A" C0603 1121.78,1701 r180 top
FL11 "MPZ1608S221A" C0603 548,1060.77 r90 bottom
FL12 "MPZ1608S221A" C0603 1147.78,1595.63 r270 bottom
FL13 "MPZ1608S221A" C0603 987.21,1503.78 r180 bottom
FL14 "MPZ1608S221A" C0603 603.97,1060.77 r90 bottom
FL15 "MPZ1608S221A" C0603 1413,476 r90 top
FL16 "MPZ1608S221A" C0603 998.78,1687 r180 bottom
FL17 "MPZ1608S221A" C0603 893.67,1658 r180 top
FL18 "MPZ1608S221A" C0603 538.11,2668 r180 top
FL19 "MPZ1608S221A" C0603 744.11,2683 r180 bottom
FL20 "MPZ1608S221A" C0603 303.11,2406.65 r180 top
FL21 "MPZ1608S221A" C0603 330.11,2145 r180 top
FL22 "MPZ1608S221A" C0603 554.13,817.8 r180 top
FL23 "MPZ1608S221A" C0603 422.24,1006.78 r180 top
FL24 "MPZ1608S221A" C0603 332.3,1922.74 r90 top
H1 "Hole" Standoff3mm 1787.11,1962 r0 top
H2 "Hole" Standoff3mm 216,2697 r0 top
H3 "Hole" Standoff3mm 1787.11,173 r0 top
H4 "Hole" Standoff3mm 194,166 r0 top
J1 "10029449-111RLF" 10029449-111RLF 100,720 r270 top
J2 "USB Micro" 10118194-0001LF 61,2237.76 r270 top
J3 "20021121-00010C4LF" FTSH-105-XX-X-DV 773,1884.43 r90 top
J4 "20021121-00010C4LF" FTSH-105-XX-X-DV 1019.11,242 r90 top
J5 "LS050T1SX10" 504208-3410 158.77,1318.9 r90 top
J6 "20021121-00010C4LF" FTSH-105-XX-X-DV 1390.11,2264 r270 top
J7 "Header 2X2" HDR2X2 1534,249 r135 top
L1 "10uH" INDP3027X15L 1627,382.14 r0 top
L5 "DLW21HN900SQ2L" DLW21HN900SQ2L 388,2251.76 r180 top
Q1 "DMC2400UV" SOT563-FL50P162X170-6N 491.11,2437 r180 bottom
R1 "100K" R0603 1681.11,853 r270 top
R2 "191K" R0603 1428.88,852.74 r270 top
R3 "1K" R0603 1491.87,852.74 r270 top
R4 "4.7K" R0603 1797.11,886 r180 top
R5 "2K" R0402 877.67,1329 r270 bottom
R6 "100K" R0402 419.11,2435.65 r270 bottom
R7 "100K" R0402 1750.05,1399.43 r180 top
R8 "165K" R0402 1643.75,1403.36 r0 top
R9 "R0402TBD" R0402 469.3,1719.74 r0 top
R10 "" R0603 1741,619 r90 top
R11 "" R0603 188.26,895 r270 bottom
R12 "" R0603 133.26,895 r270 bottom
R13 "" R0603 1449.62,657.17 r270 top
R14 "R0402TBD" R0402 786.98,827 r90 top
R15 "56K" R0603 1554.87,852.74 r270 top
R16 "R0402TBD" R0402 747,827 r90 top
R17 "R0402TBD" R0402 469.3,1680.74 r0 top
R18 "R0402TBD" R0402 656.44,1093.6 r180 top
R19 "10K" R0402 1588.04,105.6 r270 bottom
R20 "10K" R0402 943.35,107.02 r270 bottom
R21 "1k" R0402 1206.11,2692 r0 top
R22 "3.3K" R0603 1319.11,2499 r90 top
R23 "10K" R0402 1219.11,2666.9 r90 bottom
R24 "1k" R0402 1508.31,105.6 r270 bottom
R25 "1k" R0402 863.63,107.02 r270 bottom
R26 "1k" R0402 1206.11,2731 r180 top
R27 "1k" R0402 1206.11,2532 r270 top
R28 "1k" R0402 1247.11,2532 r270 top
R29 "1K" R0603 1508.12,657.17 r270 top
R30 "R0603TBD" R0603 1386,657 r270 top
R31 "R0402TBD" R0402 1144.11,1920.9 r90 top
R32 "" R0603 1683.62,657.17 r270 top
R33 "1k" R0402 1232.11,2626 r0 top
R34 "R0603TBD" R0603 1566.62,657.17 r270 top
R35 "4.7K" R0603 483.11,2456.68 r180 top
R36 "100K" R0402 564.11,2435.65 r270 bottom
R43 "22r" R0402 726.11,2613 r180 top
R44 "1M" R0402 121.11,2028 r90 top
R46 "22r" R0402 726.11,2573.81 r180 top
R72 "1M" R0402 949.11,2334.76 r180 top
S1 "PTS840 GKP SMTR LFS" "PTS840 GKP SMTR LFS" 1352.11,61.83 r180 bottom
S2 "PTS840 GKP SMTR LFS" "PTS840 GKP SMTR LFS" 706.11,62.83 r180 bottom
TP1 "TestPoint" TP1-27 805.11,242 r90 top
TP2 "TestPoint" TP1-27 328.11,2343 r270 top
TP3 "TestPoint" TP1-27 303.11,2061 r270 top
TP4 "TestPoint" TP1-27 1345.11,824 r90 top
TP5 "TestPoint" TP1-27 1482.33,1403.37 r90 top
TP6 "TestPoint" TP1-27 625.11,2767 r90 top
TP7 "TestPoint" TP1-27 1292,374 r180 top
TP8 "TestPoint" TP1-27 512.11,2347 r90 top
TP9 "TestPoint" TP1-27 1791,712 r270 top
TP10 "TestPoint" TP1-27 1591,2203 r90 top
TP11 "TestPoint" TP1-27 1641,2477 r270 top
TP12 "TestPoint" TP1-27 763,377 r90 top
TP13 "TestPoint" TP1-27 1016.11,1951 r90 top
TP14 "TestPoint" TP1-27 1018.11,1850 r90 top
TP15 "TestPoint" TP1-27 609.11,2108 r90 top
TP16 "TestPoint" TP1-27 1379,565 r270 top
TP17 "TestPoint" TP1-27 1531,2476 r90 top
TP18 "TestPoint" TP1-27 1416,2476 r90 top
TP19 "TestPoint" TP1-27 79,1847 r90 top
TP20 "TestPoint" TP1-27 1610.11,2314 r90 top
U1 "MAX1759" TSSOP50P490X109-10L 1617.86,986.6 r180 top
U2 "MAX868" TSSOP50P490X109-10L 1620.13,1293.13 r0 top
U3 "FAN5333A" SOT95P270X145-5L 1627,535.69 r180 top
U4 "IP4787CZ32Y" QFN32-HVQFN32 635,641 r180 top
U5 "BD12IA5WEFJ-E2" TSOP-HTSOP-J8-127P600X100_HS-9M 1402.46,1628 r0 top
U6 "TC358779" BGA80-0707-065 725.67,1375 r180 top
U7 "AP2127K-3.3" SOT23-5P285X140-5L 509.11,2672.32 r90 bottom
U8 "AP2127K-1.8" SOT23-5P285X140-5L 1153,506 r0 bottom
U9 "ATmega32U4-MU" 44PW_L 968.11,2543.76 r0 top
U10 "ASFL1-27.000MHZ-EK-T" OSC-5x3.2x1.3 338.3,1765.74 r270 top
X1 "TP2053CA050C" FFC8x05-top 1384.17,2632.28 r270 bottom
X18 "PINHD-2X3" 2X03 1352.11,1894 r180 top
Y1 "7M-16.000MEEQ-T" CRYS320250 984.86,2249.2 r180 top

## Footprints (in the part's own frame and the unit in brackets; to place one, negate y for a bottom-side part, rotate by r counter-clockwise, add the part's x,y. Pads: shape width x height; smd on the part's side, far side on the other; paste and mask are expansions set on the pad)
2X03 [mil]
  oct 62x62 hole 38: 1(-100,-50) 2(-100,50) 3(0,-50) 4(0,50) 5(100,-50) 6(100,50)
  silkscreen extent -150,-100 150,100, body extent -153,-103 153,103, height 336
44PW_L [mm] "QFN, 44-Leads, Body 7x7mm, Pitch 0.5mm, Thermal Pad 5.3x5.3mm, IPC High Density"
  oval 0.85x0.25 smd: 1(-3.375,2.5) 2(-3.375,2) 3(-3.375,1.5) 4(-3.375,1) 5(-3.375,0.5) 6(-3.375,0) 7(-3.375,-0.5) 8(-3.375,-1) 9(-3.375,-1.5) 10(-3.375,-2) 11(-3.375,-2.5) 23(3.375,-2.5) 24(3.375,-2) 25(3.375,-1.5) 26(3.375,-1) 27(3.375,-0.5) 28(3.375,0) 29(3.375,0.5) 30(3.375,1) 31(3.375,1.5) 32(3.375,2) 33(3.375,2.5)
  oval 0.25x0.85 smd: 12(-2.5,-3.375) 13(-2,-3.375) 14(-1.5,-3.375) 15(-1,-3.375) 16(-0.5,-3.375) 17(0,-3.375) 18(0.5,-3.375) 19(1,-3.375) 20(1.5,-3.375) 21(2,-3.375) 22(2.5,-3.375) 34(2.5,3.375) 35(2,3.375) 36(1.5,3.375) 37(1,3.375) 38(0.5,3.375) 39(0,3.375) 40(-0.5,3.375) 41(-1,3.375) 42(-1.5,3.375) 43(-2,3.375) 44(-2.5,3.375)
  rect 5.3x5.3 smd: 45(0,0)
  silkscreen extent -4.5,-3.73 3.73,3.72, body extent -3.57,-3.57 3.57,3.57, height 0.9
504208-3410 [mm]
  rect 0.28x0.35 smd: 1(-3.2,0.915) 2(-3.2,-0.915) 3(-2.8,0.915) 4(-2.8,-0.915) 5(-2.4,0.915) 6(-2.4,-0.915) 7(-2,0.915) 8(-2,-0.915) 9(-1.6,0.915) 10(-1.6,-0.915) 11(-1.2,0.915) 12(-1.2,-0.915) 13(-0.8,0.915) 14(-0.8,-0.915) 15(-0.4,0.915) 16(-0.4,-0.915) 17(0,0.915) 18(0,-0.915) 19(0.4,0.915) 20(0.4,-0.915) 21(0.8,0.915) 22(0.8,-0.915) 23(1.2,0.915) 24(1.2,-0.915) 25(1.6,0.915) 26(1.6,-0.915) 27(2,0.915) 28(2,-0.915) 29(2.4,0.915) 30(2.4,-0.915) 31(2.8,0.915) 32(2.8,-0.915) 33(3.2,0.915) 34(3.2,-0.915)
  rect 0.5x0.37 smd: P1(-3.9,0.865) P2(-3.9,-0.865) P2(3.9,-0.865) P3(3.9,0.865)
  silkscreen extent -5.26,-0.85 4.5,2.08, body extent -4.5,-0.85 4.5,0.85, height 0.67
10029449-111RLF [mm]
  rect 0.3x1.9 smd: 1(4.75,5.95) 2(4.25,5.95) 3(3.75,5.95) 4(3.25,5.95) 5(2.75,5.95) 6(2.25,5.95) 7(1.75,5.95) 8(1.25,5.95) 9(0.75,5.95) 10(0.25,5.95) 11(-0.25,5.95) 12(-0.75,5.95) 13(-1.25,5.95) 14(-1.75,5.95) 15(-2.25,5.95) 16(-2.75,5.95) 17(-3.25,5.95) 18(-3.75,5.95) 19(-4.25,5.95)
  round 1.778 hole 1.3: 20(-7.25,4.95) 21(7.25,4.95) 22(-7.85,0) 23(7.85,0)
  silkscreen extent -7.5,-3.52 7.5,6, body extent -7.6,-3.63 7.6,6.1, height 6.18
10118194-0001LF [mm]
  rect 0.4x1.35 smd: 1(-1.3,2.7) 2(-0.65,2.7) 3(0,2.7) 4(0.65,2.7) 5(1.3,2.7)
  rrect80% 0.89x1.55 hole 0.5 slot 1.15 at 90 deg: 6(-3.5,0) 7(3.5,0)
  rrect80% 1.25x0.93 hole 0.55 slot 0.85 at 0 deg: 8(-2.5,2.7) 9(2.5,2.7)
  rect 1.5x1.55 smd: 10(-1,0) 11(1,0)
  Top Layer region: 3.5,-0.775 2.3,-0.775 2.3,0.775 3.5,0.775
  Top Layer region: -3.5,0.775 -2.3,0.775 -2.3,-0.775 -3.5,-0.775
  silkscreen extent -3.9,-2.68 3.9,2.9, body extent -4,-2.78 4,3, height 3
BGA80-0707-065 [mm] "P-VFBGA80-0707-0.65-001"
  round 0.25 smd paste+0 mask+0.055: A1(-2.925,2.925) A2(-2.275,2.925) A3(-1.625,2.925) A4(-0.975,2.925) A5(-0.325,2.925) A6(0.325,2.925) A7(0.975,2.925) A8(1.625,2.925) A9(2.275,2.925) A10(2.925,2.925) B1(-2.925,2.275) B2(-2.275,2.275) B3(-1.625,2.275) B4(-0.975,2.275) B5(-0.325,2.275) B6(0.325,2.275) B7(0.975,2.275) B8(1.625,2.275) B9(2.275,2.275) B10(2.925,2.275) C1(-2.925,1.625) C2(-2.275,1.625) C9(2.275,1.625) C10(2.925,1.625) D1(-2.925,0.975) D2(-2.275,0.975) D4(-0.975,0.975) D5(-0.325,0.975) D6(0.325,0.975) D7(0.975,0.975) D9(2.275,0.975) D10(2.925,0.975) E1(-2.925,0.325) E2(-2.275,0.325) E4(-0.975,0.325) E5(-0.325,0.325) E6(0.325,0.325) E7(0.975,0.325) E9(2.275,0.325) E10(2.925,0.325) F1(-2.925,-0.325) F2(-2.275,-0.325) F4(-0.975,-0.325) F5(-0.325,-0.325) F6(0.325,-0.325) F7(0.975,-0.325) F9(2.275,-0.325) F10(2.925,-0.325) G1(-2.925,-0.975) G2(-2.275,-0.975) G4(-0.975,-0.975) G5(-0.325,-0.975) G6(0.325,-0.975) G7(0.975,-0.975) G9(2.275,-0.975) G10(2.925,-0.975) H1(-2.925,-1.625) H2(-2.275,-1.625) H9(2.275,-1.625) H10(2.925,-1.625) J1(-2.925,-2.275) J2(-2.275,-2.275) J3(-1.625,-2.275) J4(-0.975,-2.275) J5(-0.325,-2.275) J6(0.325,-2.275) J7(0.975,-2.275) J8(1.625,-2.275) J9(2.275,-2.275) J10(2.925,-2.275) K1(-2.925,-2.925) K2(-2.275,-2.925) K3(-1.625,-2.925) K4(-0.975,-2.925) K5(-0.325,-2.925) K6(0.325,-2.925) K7(0.975,-2.925) K8(1.625,-2.925) K9(2.275,-2.925) K10(2.925,-2.925)
  silkscreen extent -4.14,-3.5 3.5,4.14, body extent -3.5,-3.5 3.5,3.5, height 1
C0402 [mil]
  rrect40% 22x24 smd: 1(-18.7,0) 2(19,0)
  body extent -20,-10 20,10, height 20
C0603 [mm]
  rrect40% 0.74x1 smd: 1(-0.68,0) 2(0.68,0)
  body extent -0.8,-0.4 0.8,0.4, height 0.8
C0805 [mil]
  rrect50% 52x60 smd: 1(-37.4,0) 2(38,0)
  body extent -40,-30 40,30, height 35
CRYS320250 [mil]
  rect 52x42 smd: 1(-45.28,-36.42) 2(46,-36.42) 3(46,37) 4(-45.28,37)
  silkscreen extent -63,-49 63,50, body extent -63,-49 63,50, height 28
DLW21HN900SQ2L [mm]
  rect 0.9x0.4 smd: 1(-0.85,0.4) 2(0.85,0.4) 3(0.85,-0.4) 4(-0.85,-0.4)
  silkscreen extent -1,-0.6 1,0.6, body extent -1,-0.6 1,0.6, height 1
FFC8x05-top [mm] "SFV8R-2STE9HLF"
  rect 0.3x1.4 smd: 1(-1.75,2) 2(-1.25,2) 3(-0.75,2) 4(-0.25,2) 5(0.25,2) 6(0.75,2) 7(1.25,2) 8(1.75,2)
  Top Layer region: 4.15,1.9 2.2,1.9 2.2,-0.4 4.15,-0.4 4.15,0.3 4.85,0.3 4.85,1.2 4.15,1.2
  Top Layer region: -4.15,1.9 -2.2,1.9 -2.2,-0.4 -4.15,-0.4 -4.15,0.3 -4.85,0.3 -4.85,1.2 -4.15,1.2
  silkscreen extent -4.75,-2.5 4.75,2.8, body extent -4.75,-2.5 4.75,1.7, height 1.8
FIDUCIAL-1X2 [mil]
  rrect100% 40x40 smd paste-3897.64 mask+20: 1(0,0)
  body extent -20,-20 20,20, height 1
FTSH-105-XX-X-DV [mm] "1.27mm pitch, 10 pin, terminal strip; vertical, SMT"
  rect 0.75x2.8 smd: 1(2.54,2.03) 2(2.54,-2.03) 3(1.27,2.03) 4(1.27,-2.03) 5(0,2.03) 6(0,-2.03) 7(-1.27,2.03) 8(-1.27,-2.03) 9(-2.54,2.03) 10(-2.54,-2.03)
  silkscreen extent 3.28,3.03 3.52,3.27
HDR2X2 [mm] "Connector; Header; 2x2 Position"
  rect 1.5x1.5 hole 0.9: 1(0,0)
  round 1.5 hole 0.9: 2(0,2.54) 3(2.54,0) 4(2.54,2.54)
  silkscreen extent -1.27,-1.27 3.81,3.81, body extent -1.37,-1.37 3.91,3.91, height 0.25
INDP3027X15L [mm] "Precision Wire Wound Inductor, 2-Leads, Body 3.00x2.65mm, IPC High Density"
  rect 1.55x2.7 smd: 1(-1.075,0) 2(1.075,0)
  body extent -1.55,-1.35 1.55,1.35, height 1.5
OSC-5x3.2x1.3 [mm]
  rect 1.7x1.5 smd paste-1.905: 1(-1.27,-1.1) 2(1.27,-1.1) 3(1.27,1.1) 4(-1.27,1.1)
  silkscreen extent -2.5,-1.6 2.5,1.6, body extent -2.5,-1.6 2.5,1.6, height 1.3
"PTS840 GKP SMTR LFS" [mm] "SWITCH TACTILE SPST-NO 0.05A 12V"
  rect 1.4x1.05 smd: 1(-2.5,0.725) 2(2.5,0.725) 3(-2.5,-0.725) 4(2.5,-0.725)
  rect 1.1x0.5 smd paste-2: 5(0,1.7)
  rect 0x0 hole 0.7 paste-1.905: 6(0,0.9) 7(0,-0.9)
  silkscreen extent -1.75,-2.1 1.75,1.45, body extent -1.75,-2.1 1.75,1.45, height 1.35
QFN32-HVQFN32 [mm] "32 terminals; body 5 x 5 x 0.85 mm"
  oval 0.75x0.25 smd: 1(-2.375,1.75) 2(-2.375,1.25) 3(-2.375,0.75) 4(-2.375,0.25) 5(-2.375,-0.25) 6(-2.375,-0.75) 7(-2.375,-1.25) 8(-2.375,-1.75) 17(2.375,-1.75) 18(2.375,-1.25) 19(2.375,-0.75) 20(2.375,-0.25) 21(2.375,0.25) 22(2.375,0.75) 23(2.375,1.25) 24(2.375,1.75)
  oval 0.25x0.75 smd: 9(-1.75,-2.375) 10(-1.25,-2.375) 11(-0.75,-2.375) 12(-0.25,-2.375) 13(0.25,-2.375) 14(0.75,-2.375) 15(1.25,-2.375) 16(1.75,-2.375) 25(1.75,2.375) 26(1.25,2.375) 27(0.75,2.375) 28(0.25,2.375) 29(-0.25,2.375) 30(-0.75,2.375) 31(-1.25,2.375) 32(-1.75,2.375)
  rect 3.6x3.6 smd: 33(0,0)
  silkscreen extent -3.47,-2.7 2.7,2.7, body extent -2.55,-2.55 2.55,2.55, height 0.85
R0402 [mil]
  rrect40% 22x24 smd: 1(-18.9,0) 2(19,0)
  body extent -20,-10 20,10, height 14
R0603 [mm]
  rrect40% 0.74x1 smd: 1(-0.68,0) 2(0.68,0)
  body extent -0.8,-0.4 0.8,0.4, height 0.8
SOD523 [mil]
  rect 28x20 smd: A(27.56,0) C(-27.56,0)
  body extent -30,-16 30,16, height 28
SOD923-100X40-2N [mm] "SODFL, 2-Leads, Body 0.60x1.00mm, IPC Medium Density"
  rect 0.3x0.4 smd paste-0.025: A(0.45,0) C(-0.45,0)
  silkscreen extent -0.55,0.35 -0.45,0.45, body extent -0.42,-0.33 0.43,0.33, height 0.4
SOT23-5P285X140-5L [mm] "SOT26, 6-Leads, Body 3.00x2.85mm, Pitch 0.95mm, IPC High Density"
  rect 0.85x0.6 smd: 1(-1.275,0.95) 2(-1.275,0) 3(-1.275,-0.95) 4(1.275,-0.95) 5(1.275,0.95)
  silkscreen extent -1.4,-1.55 0.45,1.93, body extent -0.85,-1.55 0.85,1.55, height 1.4
SOT95P270X145-5L [mm] "SOT23, 5-Leads, Body 2.90x2.70mm, Pitch 0.95mm, IPC High Density"
  rect 0.85x0.55 smd: 1(-1.325,0.95) 2(-1.325,0) 3(-1.325,-0.95) 4(1.325,-0.95) 5(1.325,0.95)
  silkscreen extent -1.45,-1.55 0.5,1.9, body extent -0.9,-1.55 0.9,1.55, height 1.45
SOT563-FL50P162X170-6N [mm] "SOTFL, 6-Leads, Body 1.60x1.63mm, Pitch 0.50mm, IPC Medium Density"
  rect 0.65x0.35 smd: 1(-0.775,0.5) 2(-0.775,0) 3(-0.775,-0.5) 4(0.775,-0.5) 5(0.775,0) 6(0.775,0.5)
  silkscreen extent -0.9,-0.85 0.05,1.35, body extent -0.63,-0.85 0.63,0.85, height 1.7
SOT886 [mm]
  rect 0.27x0.325 smd paste-5: 1(-0.5,-0.337) 2(0,-0.337) 3(0.5,-0.337) 4(0.5,0.337) 5(0,0.337) 6(-0.5,0.337)
  silkscreen extent -1.05,-0.83 -0.9,-0.67, body extent -0.75,-0.53 0.75,0.53, height 0.54
Standoff3mm [mm]
  round 1 smd paste-2 mask-2: 1(-1.5,-1.9)
  round 0 hole 3.3 unplated paste-2 mask-3: ""(0,0)
  Top Layer circle w1.143: c0,0 r2.438
  Bottom Layer circle w1.143: c0,0 r2.438
  silkscreen extent -2.98,-2.98 2.98,2.98, body extent -2.98,-2.98 2.98,2.98, height 0.01
TP1-27 [mil]
  rrect100% 50x50 smd: TP(0,0)
  body extent -25,-25 25,25, height 0
TSOP-HTSOP-J8-127P600X100_HS-9M [mm] "TSOP, 8-Leads, Body 5.02x3.90mm, Pitch 1.27mm, Thermal Pad 3.20x2.40mm, IPC Low Density"
  oval 1.65x0.75 smd: 1(-2.825,1.905) 2(-2.825,0.635) 3(-2.825,-0.635) 4(-2.825,-1.905) 5(2.825,-1.905) 6(2.825,-0.635) 7(2.825,0.635) 8(2.825,1.905)
  rect 3.2x4.9 smd: 9(0,0)
  silkscreen extent -2.95,-2.65 1.6,2.9, body extent -2,-2.65 2,2.65, height 1
TSSOP50P490X109-10L [mm] "TSSOP, 10-Leads, Body 3.00x3.00mm, Pitch 0.50mm, IPC High Density"
  oval 1.15x0.25 smd: 1(-2.175,1) 2(-2.175,0.5) 3(-2.175,0) 4(-2.175,-0.5) 5(-2.175,-1) 6(2.175,-1) 7(2.175,-0.5) 8(2.175,0) 9(2.175,0.5) 10(2.175,1)
  silkscreen extent -2.3,-1.58 1.2,1.8, body extent -1.6,-1.6 1.6,1.6, height 1.1

## Part data
C1: library part C1608X7R1H334K080AC, "CAP CER 0603 330nF 50V 10% X7R"
C2 C3 C8 C18 C19 C20 C21 C74 C76 C78 C79 C84 C85 C86 C87 C88 C89 C90: library part GRM188R61A475KE15D, "CAP CER 4.7UF 10V X5R 0603"
C4 C13 C17 C43 C50 C61 C63 C72 C77 C93 C94: "Capacitor Non Polarized"
C5 C62: library part CC0603ZRY5V6BB105, "CAP CER 0603 1uF 10V Y5V"
C6 C7 C14: library part C0603C104K5RACTU, "CAP CER 0603 100nF 50V 10% X7R"
C9: library part GRM21BR71H105KA12L, "CAP CER 0805 1uF 50V 10% X7R"
C10 C11 C45 C82: library part C0805C106K8PACTU, "CAP CER 0805 10uF 10V 10% X5R"
C12: library part Capacitor, "Capacitor Non Polarized"
C15 C22 C25 C28 C30 C34 C37 C39 C41 C49 C51 C52 C53 C54 C55 C56 C59 C60 C66 C68 C80 C81 C92 C95: library part GRM155R71C104KA88D, "CAP CER 0402 100nF 16V 10% X7R"
C16 C24 C26 C27 C29 C31 C33 C35 C36 C38 C40 C42 C44 C47 C67 C69 C70 C71 C73 C75 C91: library part GRM155R71H103JA88D, "CAP CER 10nF 50V X7R 0402"
C23 C32 C46 C83: library part GRM155R60J105KE19D, "CAP CER 0402 1uF 6.3V 10% X5R"
C48: library part CC0402KRX7R8BB472, "CAP CER 0402 4.7nF 25V 10% X7R"
C57 C58: library part 04025A220JAT2A, "CAP CER 0402 22pF 50V 5% C0G"
D1: library part BAT54XV2, "Diode Schottky 30V 200mA"
D2 D3 D13: "11.5 V 15 pF SMT Transient Voltage Suppressor - SOD-923"
D27: "Rail-to-rail ESD protection devices"
FID1 FID2 FID3 FID4 FID5 FID6: "Fiducial"
FL1 FL2 FL3 FL4 FL5 FL6 FL7 FL8 FL9 FL10 FL11 FL12 FL13 FL14 FL15 FL16 FL17 FL18 FL19 FL20 FL21 FL22 FL23 FL24: "Ferrite"
H1 H2 H3 H4: library part Standoff3mm, "Mechanical - Top connect"
J1: "CONN HDMI RECPT 19POS SMT R/A"
J2: library part 10118194-0001LF, "Conn Recept USB - micro B 2.0 5 Pos SMT, Rt Angle, Horizontal"
J3 J4 J6: library part "ARM Cortex JTAG-DEBUG Header"
J5: "5\"HD LCD Module connector"
J7: "Header, 2-Pin, Dual row"
L1: library part SRN3015-100M, "Ind 10uH 1A"
L5: "Common Mode Chokes Dual 90Ohm 100MHz 330mA 350mOhm DCR SMD"
Q1: "Mosfet Complementary Pair N +P"
R1: library part RC0603FR-07100KL, "RES 100K OHM 1/10W 1% 0603 SMD"
R2: library part RC0603FR-07191KL, "RES 191K OHM 1% 1/10W 0603 SMD"
R3 R29: library part ERJ-3EKF1001V, "RES 0603 1K 100mW 1%"
R4 R35: library part ERJ3EKF4701V, "RES 0603 4.7K 100mW 1%"
R5: library part RC0402FR-072KL, "RES SMD 2K OHM 1% 1/16W 0402"
R6 R7 R36: library part RC0402FR-07100KL, "RES 100K OHM 1% 1/16W 0402"
R8: library part CRCW0402165KFKED, "RES 165K OHM 1% 1/16W 0402"
R9 R14 R16 R17 R18 R30 R31 R34: "Resistor"
R10 R11 R12 R13 R32: library part Resistor, "Resistor"
R15: library part RC0603FR-0756KL, "RES 56K OHM 1% 1/10W 0603 56K"
R19 R20 R23: library part RC0402FR-0710KP, "RES SMD 10K OHM 1% 1/16W 0402"
R21 R24 R25 R26 R27 R28 R33: library part RK73H1ETTP1001F, "RES 0402 1k 63mW 1%"
R22: library part ERJ-3GEYJ332V, "RES 0603 3.3K 100mW 1%"
R43 R46: library part RC0402FR-0722RL, "RES 0402 22r 63mW 1%"
R44 R72: library part ERJ2GEJ105X, "RES 0402 1M 100mW 5%"
S1 S2: "SWITCH TACTILE SPST-NO 0.05A 12V"
TP1 TP2 TP3 TP4 TP5 TP6 TP7 TP8 TP9 TP10 TP11 TP12 TP13 TP14 TP15 TP16 TP17 TP18 TP19 TP20: "Test Point"
U1: "Buck/Boost Regulating Charge Pump"
U2: "Regulated -2x Inverting Charge Pump"
U3: library part FAN5333, "LED Driver w/ integrated switch"
U4: "IC DVI/HDMI ESD PROTECT 32HVQFN"
U5: "LDO Regulator 500mA 1.2V"
U7: library part AP2127K-3.3TRG1, "LDO 3.3V 0.3A SOT25"
U8: library part AP2127K-1.8TRG1, "LDO 1.8V 0.3A SOT25"
U9: library part MC-8B-ATM16U4-SQ45
U10: "OSC XO 27.000MHZ HCMOS TTL SMD"
X1: "UltiMachine 5\" HD Touch Interface"
X18: "PIN HEADER"
Y1: "Crystal 16mHz 10ppm 10pF"

## Via types
v1: diameter 20, hole 10, Top Layer to Bottom Layer, 120 vias
v2: diameter 16, hole 8, Top Layer to Bottom Layer, tented both sides, 85 vias
v3: diameter 24, hole 12, Top Layer to Bottom Layer, tented both sides, 58 vias
v4: diameter 30, hole 15, Top Layer to Bottom Layer, tented both sides, 34 vias
v5: diameter 19.68, hole 8, Top Layer to Bottom Layer, 34 vias
v6: diameter 18, hole 8, Top Layer to Bottom Layer, tented both sides, 31 vias
v7: diameter 29, hole 15, Top Layer to Bottom Layer, tented both sides, 26 vias
v8: diameter 24, hole 10, Top Layer to Bottom Layer, tented both sides, 20 vias
v9: diameter 30, hole 15, Top Layer to Bottom Layer, 17 vias
v10: diameter 20, hole 10, Top Layer to Bottom Layer, tented both sides, 13 vias
v11: diameter 26, hole 11.81, Top Layer to Bottom Layer, 12 vias
v12: diameter 16, hole 8, Top Layer to Bottom Layer, 9 vias
v13: diameter 25, hole 10, Top Layer to Bottom Layer, 9 vias
v14: diameter 26, hole 12, Top Layer to Bottom Layer, tented both sides, 5 vias
v15: diameter 24, hole 12, Top Layer to Bottom Layer, 5 vias
v16: diameter 20, hole 8, Top Layer to Bottom Layer, tented both sides, 4 vias
v17: diameter 36, hole 20, Top Layer to Bottom Layer, tented both sides, 4 vias
v18: diameter 40, hole 24, Top Layer to Bottom Layer, tented both sides, 2 vias
v19: diameter 27, hole 12, Top Layer to Bottom Layer, tented both sides, 1 vias
v20: diameter 32, hole 15, Top Layer to Bottom Layer, tented both sides, 1 vias
v21: diameter 20, hole 8, Top Layer to Bottom Layer, 1 vias

## Nets (pads, with @x,y where several pads share a name; then routed paths per layer and width w, separated by ;. In a path a pad name is that pad's centre, name@x,y a point inside that pad or via, vN(x,y) a via of type N, cw(c..) or ccw(c..) an arc to the next point about the centre after c; other vN are vias at no path point)
1.2V: C3.1 FL10.1 FL11.1 FL12.1 FL14.1 J4.5 TP1.TP U5.1 U5.2 | length 3136.1
  Top Layer w10: v3(757,1096) 757,1101.89 774,1118.89 v3(774,1151) ; v8(1147.78,1663) 1148.55,1663.77 FL10.1@1148.55,1701 1149.97,1702.42 C3.1@1210.51,1702.42 1209.78,1703.15 v3(1209.78,1737)
  Top Layer w12: TP1.TP@805.11,242 853,242 ; J4.5@939.19,242 853,242 ; v3(1209.78,1429.67) 1284,1355.45 1284,1135 1224.11,1075.11 1224.11,679.11 942.5,397.5 890.61,397.5 853.11,360 853.11,242.11 853,242 ; C3.1@1210.51,1702.42 1211.09,1703 1245.78,1703 ; U5.2@1291.24,1653 1255.47,1653 1245.78,1662.7 1245.78,1703 ; U5.1@1291.24,1703 1245.78,1703
  Bottom Layer w10: FL11.1@548,1034 FL14.1@603.97,1034 603.97,1011 612.97,1002 697.11,1002 757,1061.89 v3(757,1096) ; v3(774,1151) 948,1151 1209.78,1412.78 v3(1209.78,1429.67) v3(1209.78,1737) ; FL12.1@1147.78,1622.4 v8(1147.78,1663) ; v3@1209.78,1738 v3(1209.78,1737) ; v3@1210.78,1738 v3(1209.78,1737)
1.8OK: C14.1 R4.2 U1.2 | length 251.1
  Top Layer w5: U1.2@1703.49,966.91 1729.53,966.91 1745.61,950.83 1745.61,833.5 1751.11,828 C14.1@1770.34,828 R4.2@1770.34,886
1.8V: C4.1 C75.2 C79.1 FL9.2 J4.1 J5.12 | length 2311.7
  Top Layer w4: J5.12@194.8,1271.65 209.16,1271.65 217.04,1263.78
  Top Layer w5: 217.04,1263.78 230.82,1250 C75.2@251,1250
  Top Layer w10: C75.2@251,1250 324.7,1176.3 324.7,1136.71 v15(253.94,1065.94) ; J4.1@939.19,342 939.19,362.19 1210.77,633.77 v9(1243,633.77) 1243,675.89 1250.11,683 v3(1250.11,914)
  Bottom Layer w10: v15(253.94,1065.94) 253.94,1048.23 233.27,1027.56 233.27,969.49 260.76,942 1222.11,942 v3(1250.11,914) ; v9(1243,633.77) C79.1@1303.77,573 1303.77,524 FL9.2@1306,521.77